# Altium PCB PCB-HC15C_REV1.PcbDoc (part 1 of 2)
Units mil, origin at the board's own origin, x right, y up, seen from the top; angles counter-clockwise.
Board outline 5600 x 4750 mil, 4 copper layers (Top Layer, InternalPlane1, InternalPlane2, Bottom Layer); 217 components, 162 nets, 705 pads, 241 vias.
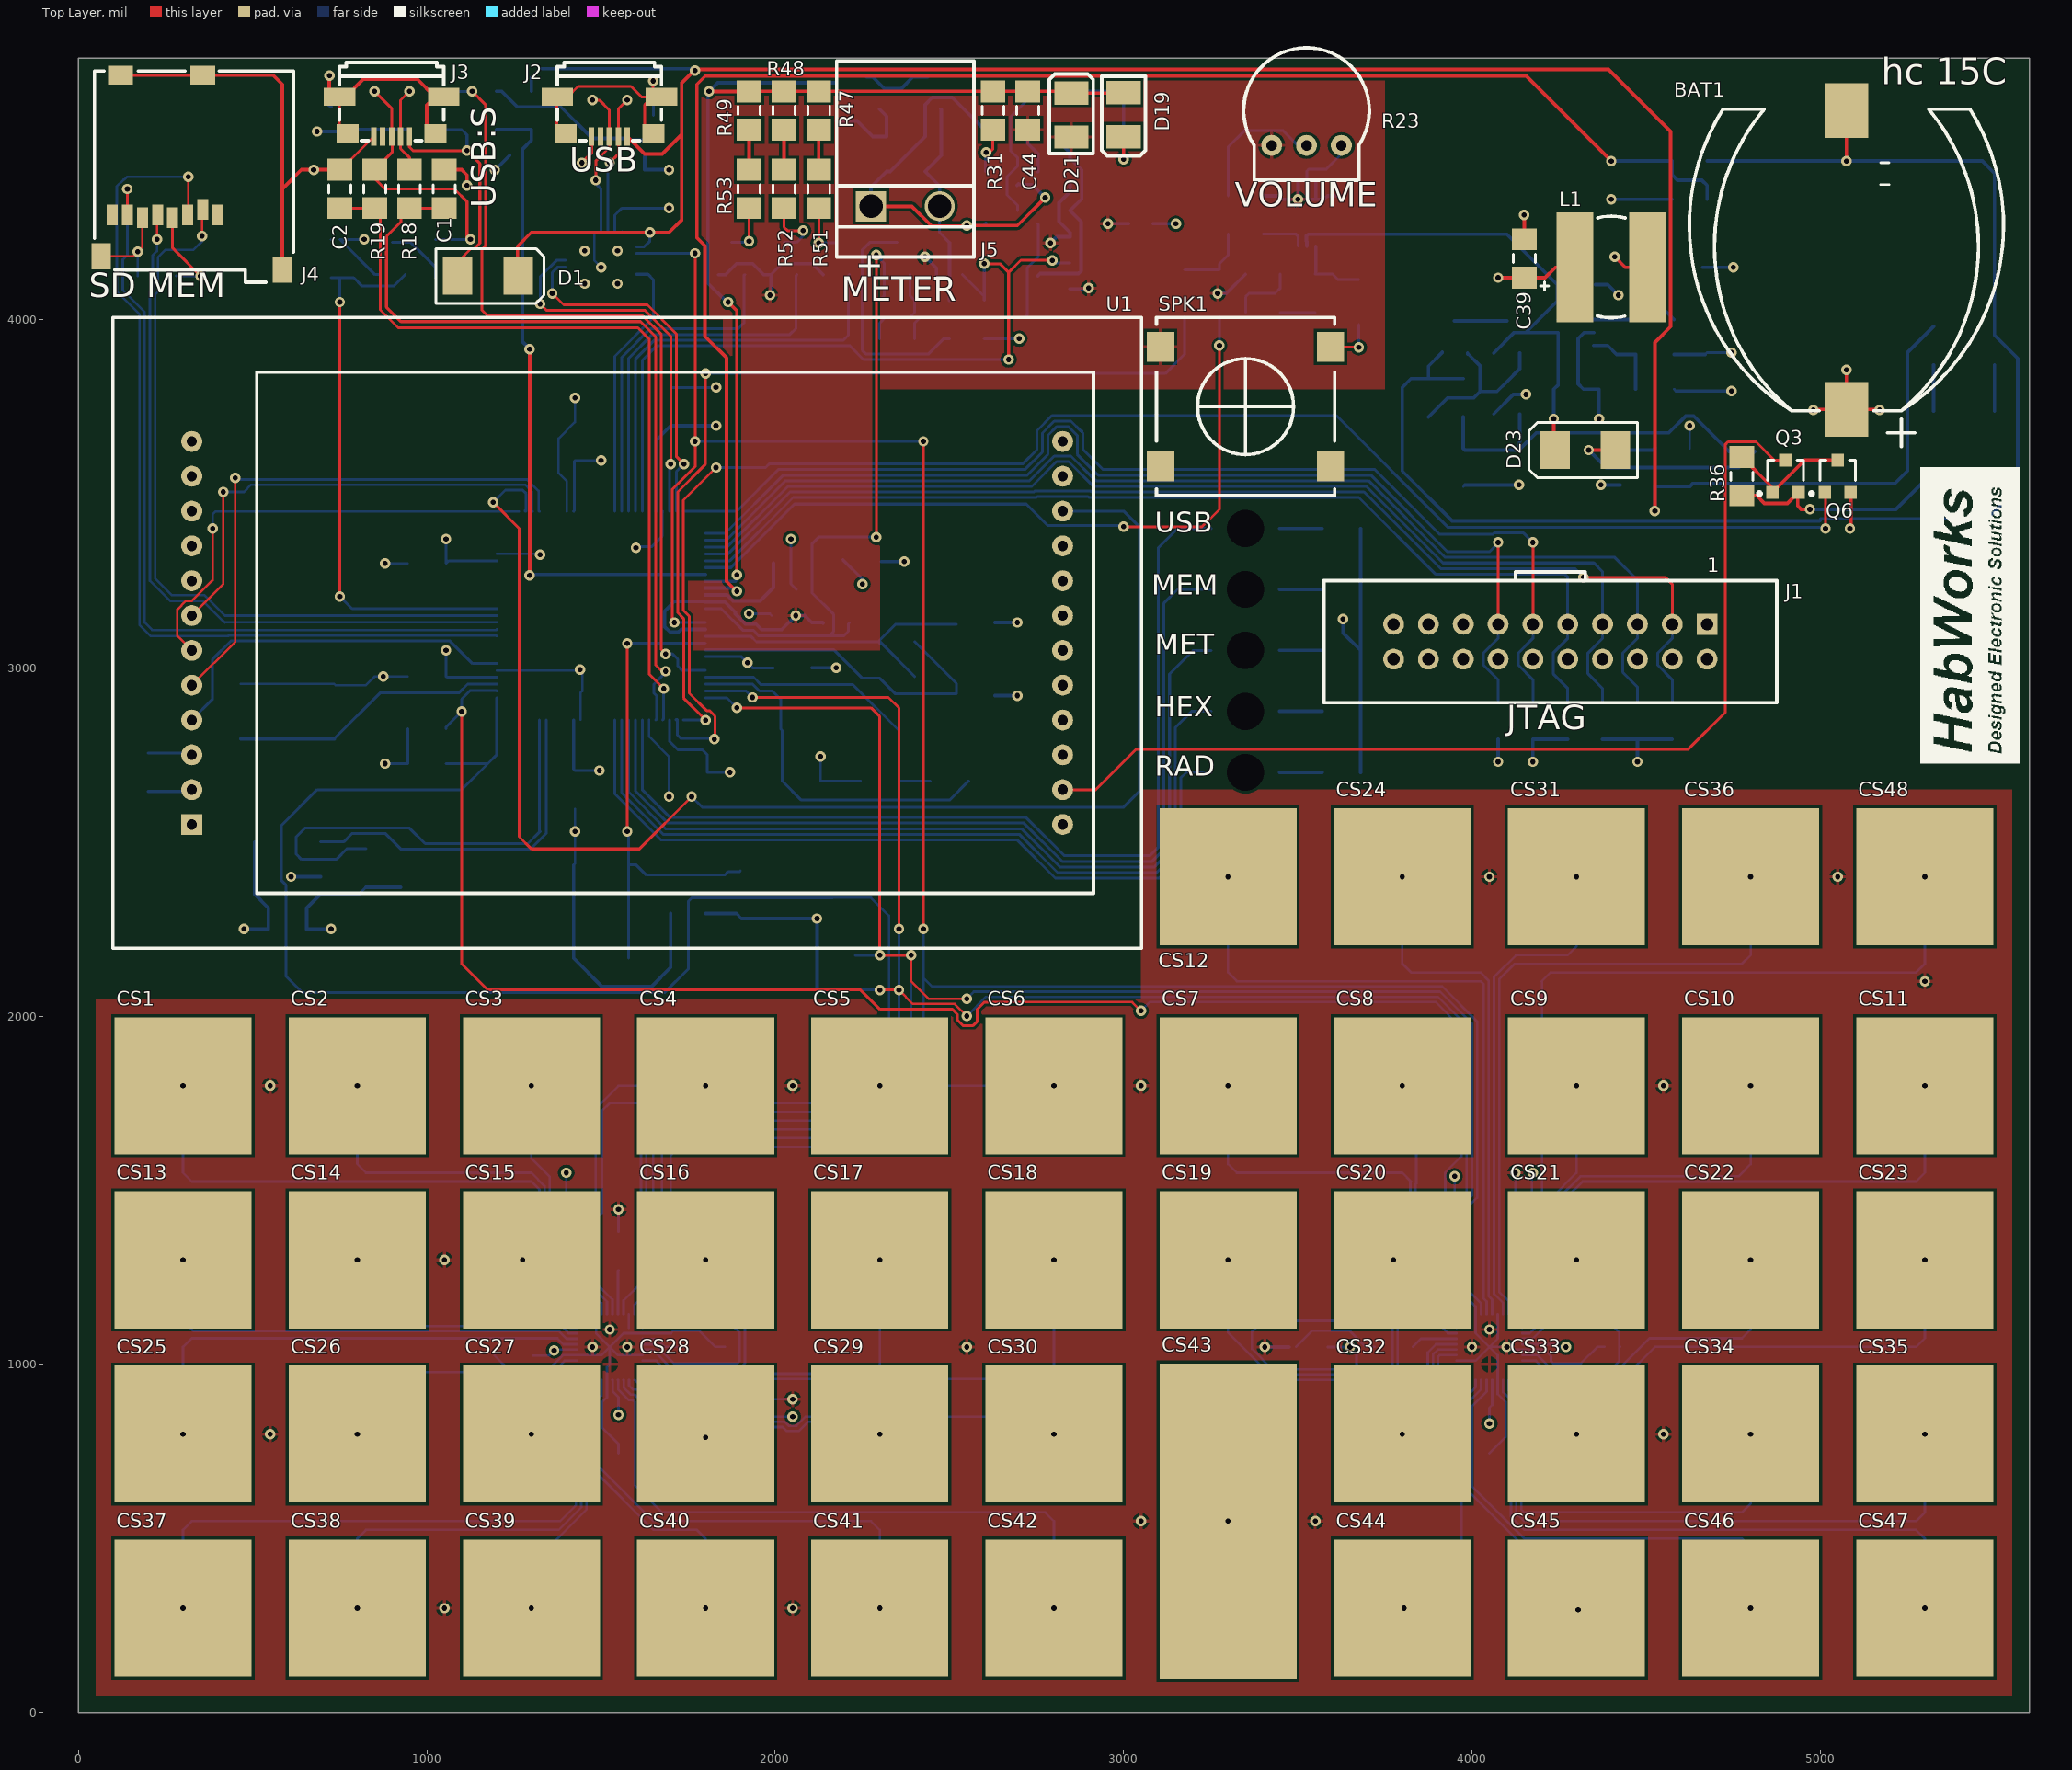
[diagram p0: Top Layer view]
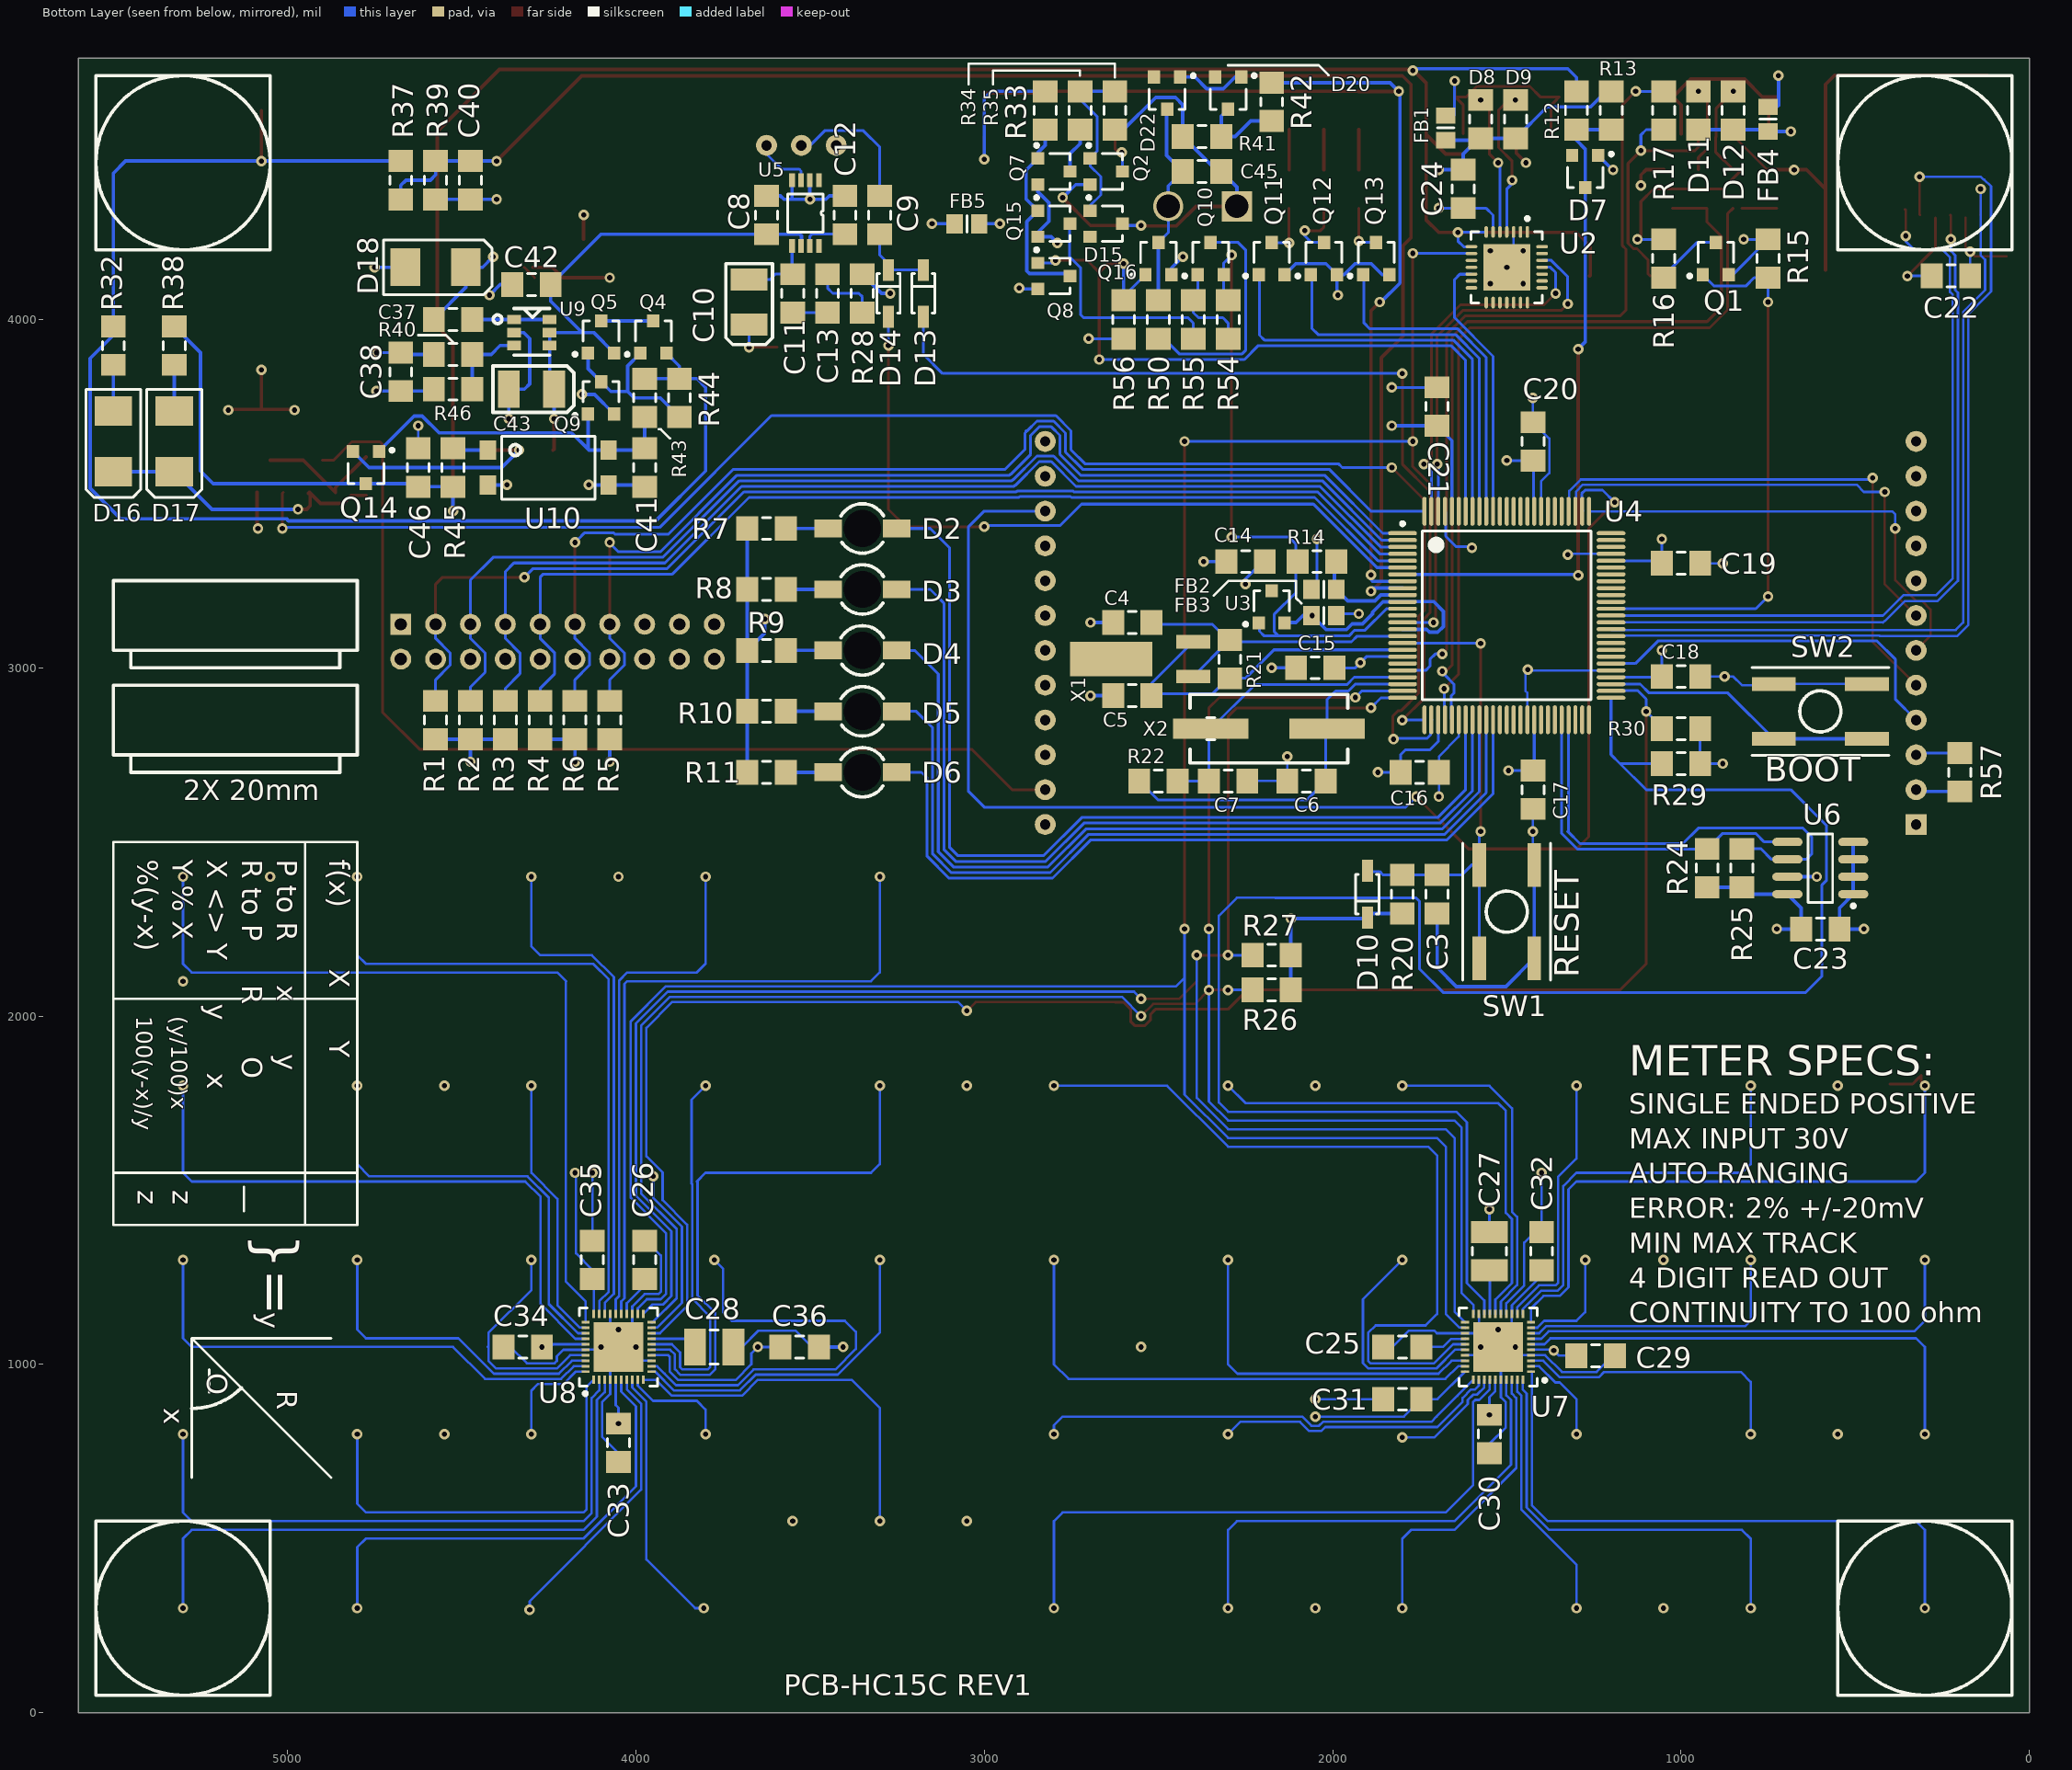
[diagram p1: Bottom Layer view, seen from below]
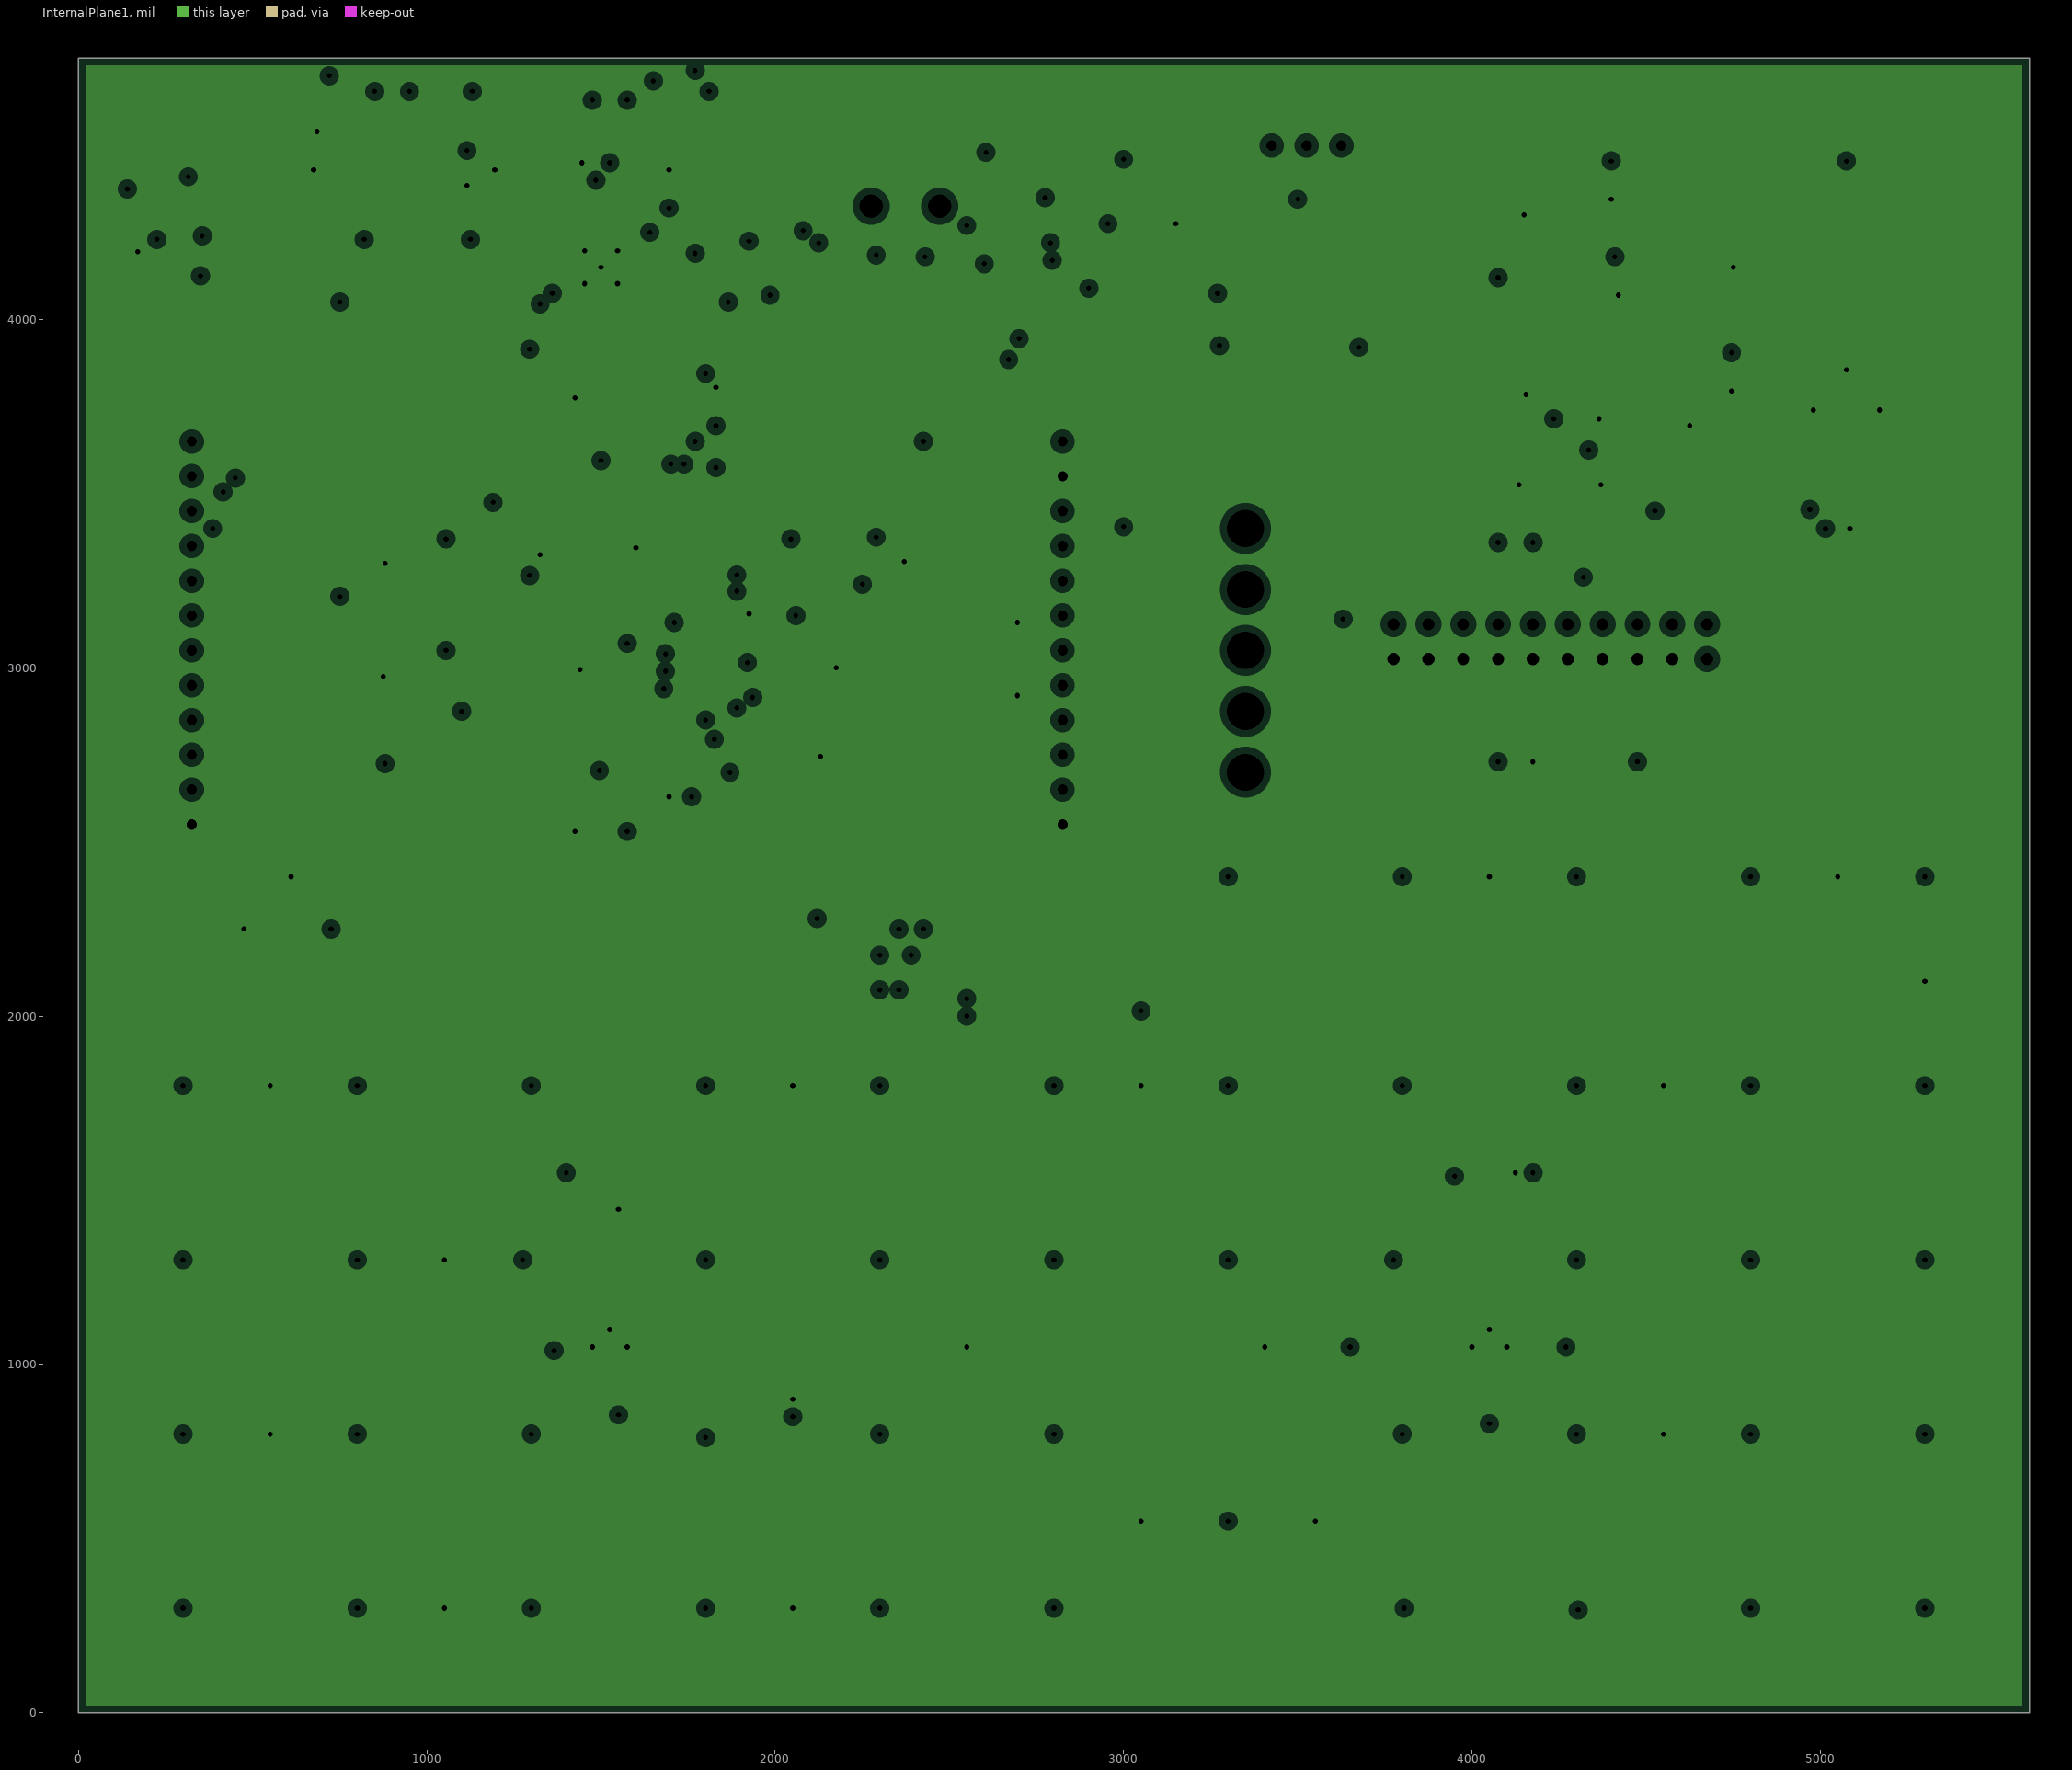
[diagram p2: InternalPlane1, clearances drawn from the general rule]
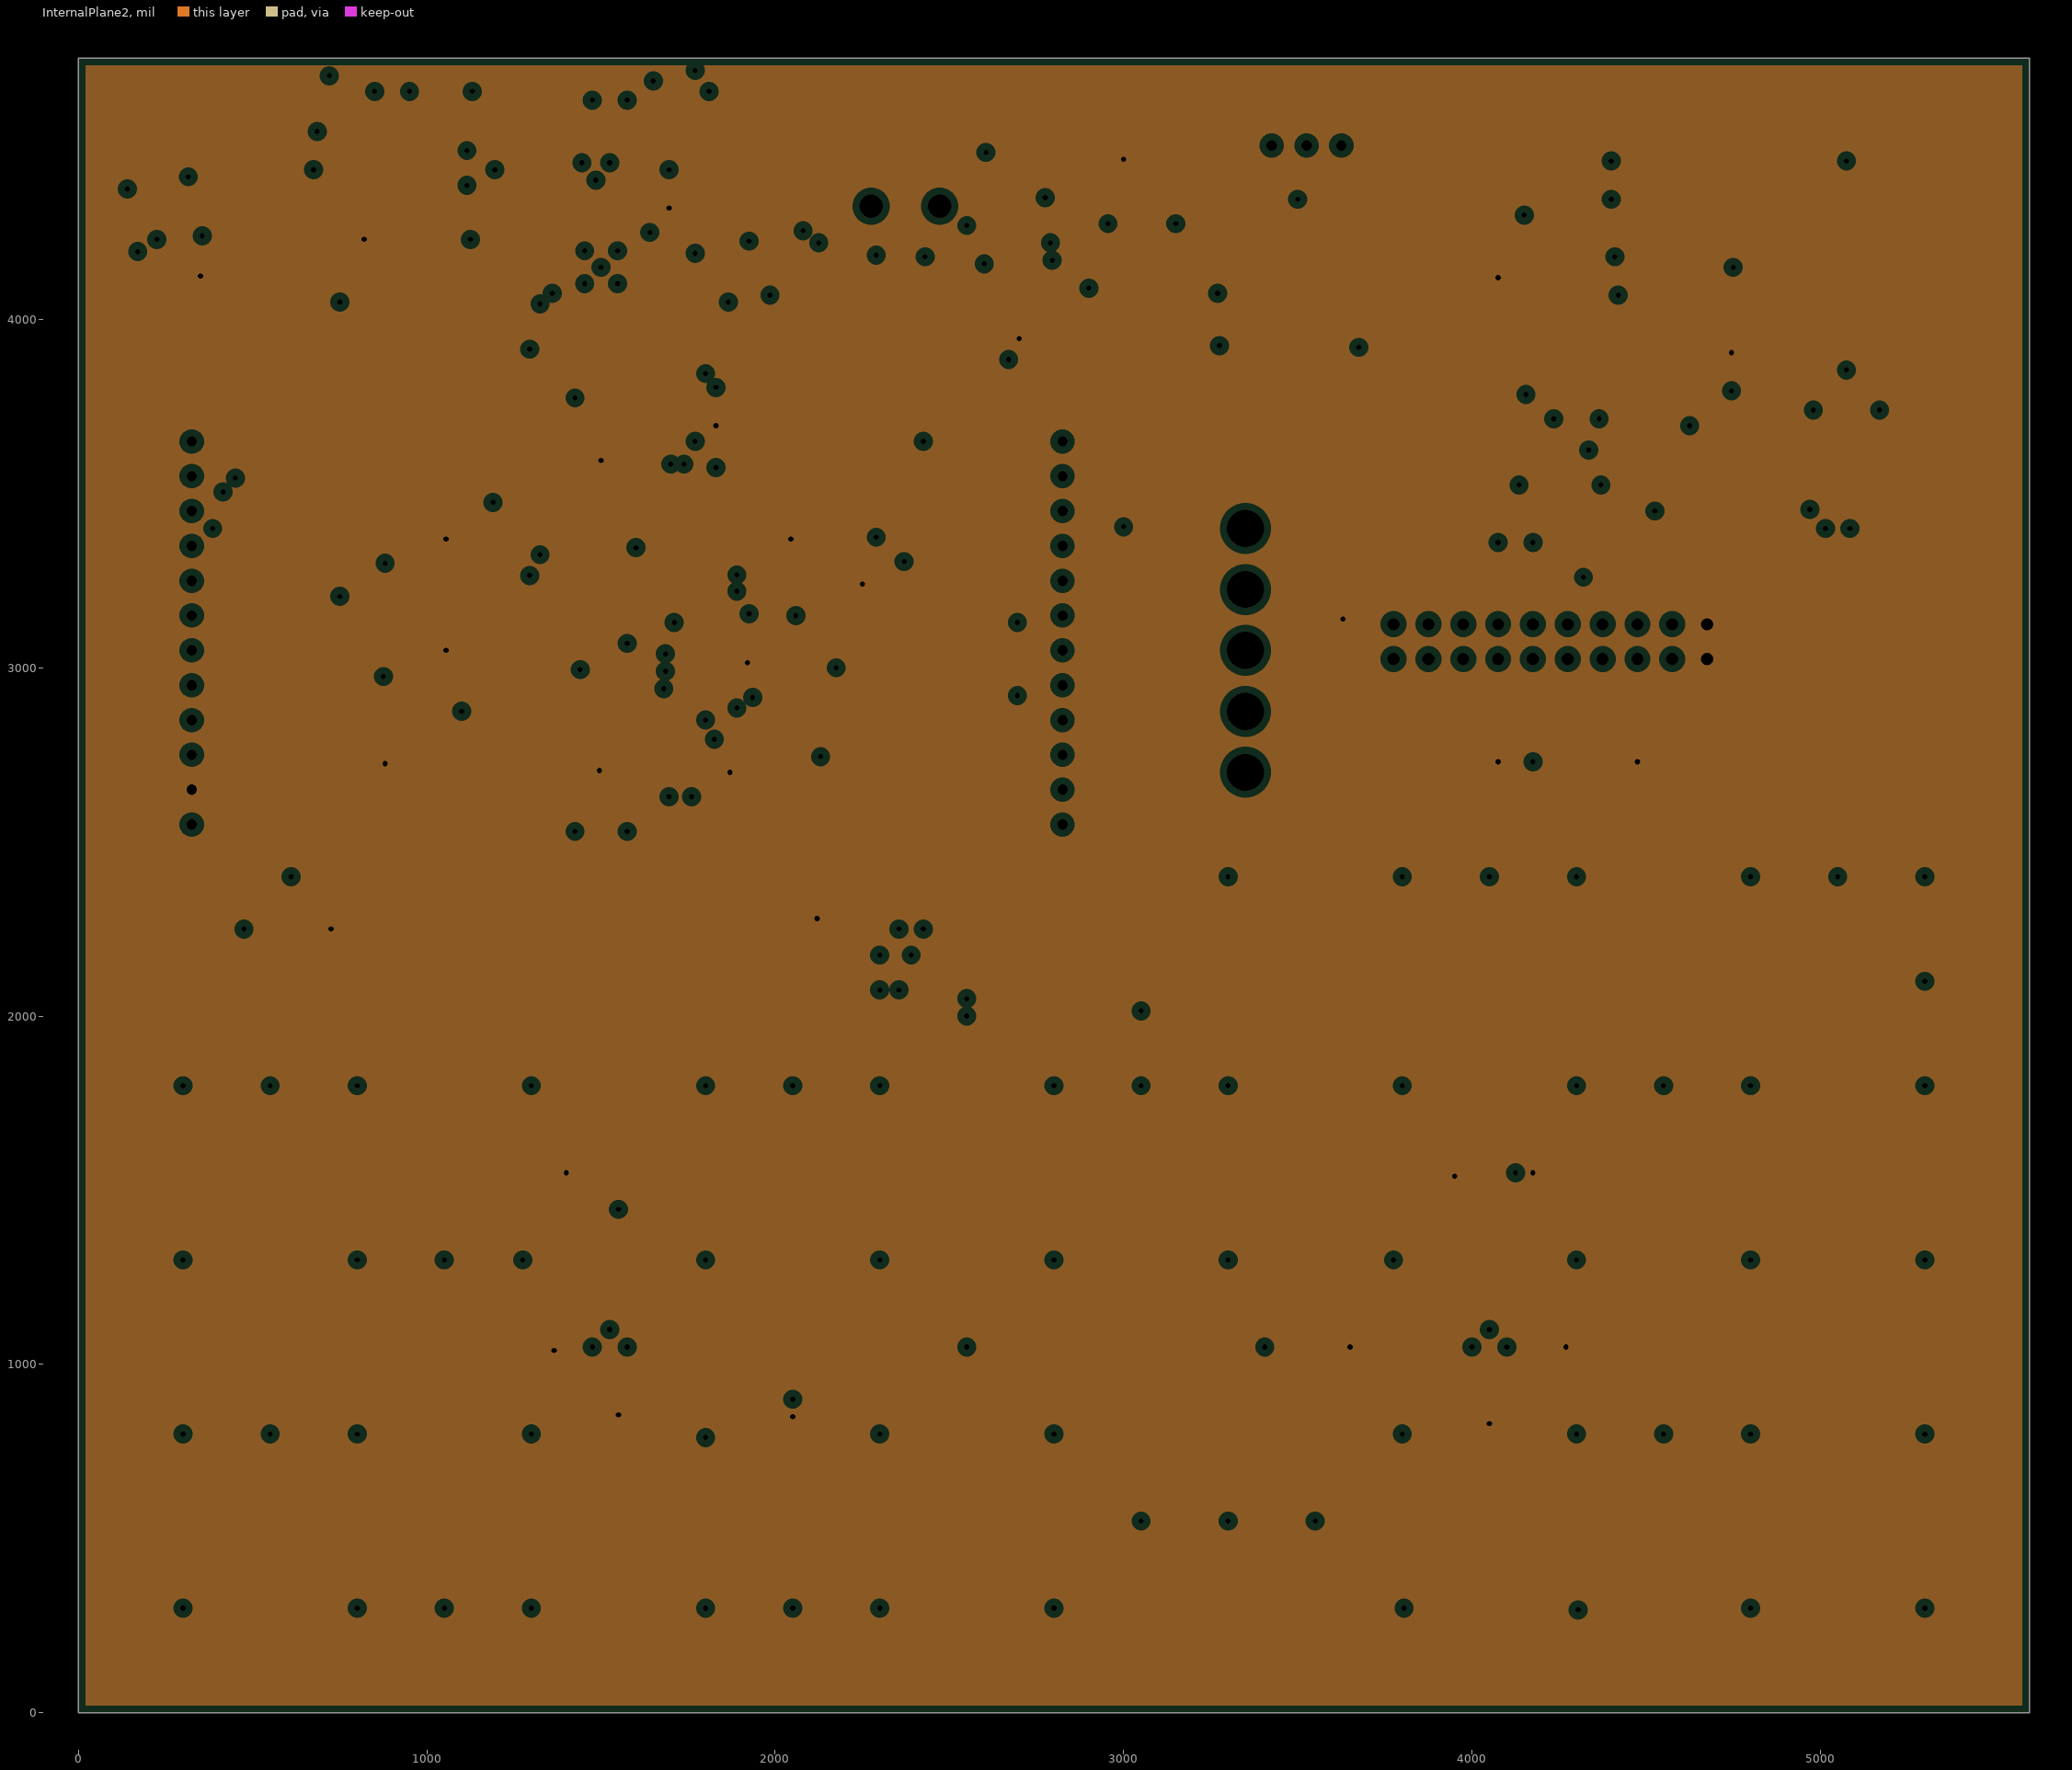
[diagram p3: InternalPlane2, clearances drawn from the general rule]

## Layer stack, top to bottom
Top Layer: signal copper 1.4
Dielectric: core 12.6, FR-4, Dk 4.8
InternalPlane1: plane copper 1.4, net GND
Dielectric: prepreg 12.6, FR-4, Dk 4.8
InternalPlane2: plane copper 1.4, net 3.3V
Dielectric: core 12.6, FR-4, Dk 4.8
Bottom Layer: signal copper 1.4

## Board outline
0,0 5600,0 5600,4750 0,4750

## Design rules (kind name [scope] priority, off if disabled: settings)
Clearance UNDERMOUNT_LED [(HasFootprint('OSRAM_XX_M47K')) vs (HasFootprint('OSRAM_XX_M47K'))] p1: gap=5
Clearance Clearance_U8 [(InComponent('U8')) vs (InComponent('U8'))] p2: gap=7
Clearance Clearance_U7 [(InComponent('U7')) vs (InComponent('U7'))] p3: gap=7
Clearance Clearance_U4 [(InComponent('U4')) vs (InComponent('U4'))] p4: gap=7.8
Clearance Clearance_U2 [(InComponent('U2')) vs (InComponent('U2'))] p5: gap=7
Clearance Clearance_USB_J3 [(InComponent('J3')) vs (InComponent('J3'))] p6: gap=7
Clearance Clearance_USB_J2 [(InComponent('J2')) vs (InComponent('J2'))] p7: gap=7
Clearance [All] p8: gap=8
DiffPairsRouting [All] p1: maxlimit=10 minlimit=10 mostfreqgap=10 maxuncoupledlength=500
HoleSize [All] p1: absolutevalues=TRUE maxlimit=125 minlimit=1 maxpercent=80.000 minpercent=20.000
MinimumSolderMaskSliver MinimumSolderMaskSliver_U5 [(InComponent('U5')) vs (InComponent('U5'))] p1: minsoldermaskwidth=0
MinimumSolderMaskSliver MinimumSolderMaskSliver_U9 [(InComponent('U9')) vs (InComponent('U9'))] p2: minsoldermaskwidth=0
MinimumSolderMaskSliver MinimumSolderMaskSliver_J4 [(InComponent('J4')) vs (InComponent('J4'))] p3: minsoldermaskwidth=0
MinimumSolderMaskSliver MinimumSolderMaskSliver_U8 [(InComponent('U8')) vs (InComponent('U8'))] p4: minsoldermaskwidth=0
MinimumSolderMaskSliver MinimumSolderMaskSliver_U7 [(InComponent('U7')) vs (InComponent('U7'))] p5: minsoldermaskwidth=0
MinimumSolderMaskSliver MinimumSolderMaskSliver_U2 [(InComponent('U2')) vs (InComponent('U2'))] p6: minsoldermaskwidth=0
MinimumSolderMaskSliver MinimumSolderMaskSliver_J3 [(InComponent('J3')) vs (InComponent('J3'))] p7: minsoldermaskwidth=0
MinimumSolderMaskSliver MinimumSolderMaskSliver_J2 [(InComponent('J2')) vs (InComponent('J2'))] p8: minsoldermaskwidth=0
MinimumSolderMaskSliver [All] p9: minsoldermaskwidth=8
PlaneClearance [All] p1: clearance=20
PlaneConnect [All] p1: planeconnectstyle=Relief reliefexpansion=20 reliefentries=4 reliefconductorwidth=10 reliefairgap=10
PolygonConnect [All] p1: connectstyle=Relief reliefconductorwidth=10 reliefentries=4 polygonreliefangle="90 Angle"
RoomDefinition MC [InComponentClass('Components Class 2')] p1: confinementstyle=ConfineIn formatcopy=TRUE lockcomponents=FALSE outline 2750,3475 1900,3475 1900,3925 1125,3925 1125,3475 375,3475 375,2700 1300,2700 1300,2050 1975,2050 2000,2075 2000,2325 2450,2325 2475,2350 2475,2850 2750,2850
RoomDefinition USB_UART_CIRCUIT [InComponentClass('Components Class 2')] p2: confinementstyle=ConfineIn formatcopy=TRUE lockcomponents=FALSE outline 1175,4775 1725,4775 1725,3975 1175,3975
RoomDefinition AUDIO_CIRCUIT [InComponentClass('Components Class 7')] p3: confinementstyle=ConfineIn formatcopy=TRUE lockcomponents=FALSE outline 3125,4825 3775,4825 3775,3875 3125,3875
RoomDefinition METER_CIRCUIT [InComponentClass('Components Class 3')] p4: confinementstyle=ConfineIn formatcopy=TRUE lockcomponents=FALSE outline 1775,4800 3100,4800 3100,3875 1775,3875
RoutingVias [All] p1: holewidth=15 width=30 viastyle="Through Hole" minholewidth=15 minwidth=30 maxholewidth=15 maxwidth=30
ShortCircuit [All] p1 off: allowed=FALSE
SilkToSilkClearance [All] p1 off: silktosilkclearance=10
SilkscreenOverComponentPads [All] p1 off: minsilkscreentomaskgap=10
SolderMaskExpansion [All] p1: expansion=4
Width [All] p1: maxlimit=20 minlimit=7 preferedwidth=8
20 further rules are at their usual default settings.

## Classes and differential pairs
component class SCH-HC15C_REV1_PG2: C1 C2 C3 C4 C5 C6 C7 C8 C9 C10 C11 C12 C13 C14 C15 C16 C17 C18 C19 C20 C21 C22 C23 C24 D1 D2 D3 D4 D5 D6 D7 D8 D9 D10 D11 D12 D13 D14 FB1 FB2 FB3 FB4 J1 J2 J3 J4 Q1 R1 R2 R3 R4 R5 R6 R7 R8 R9 R10 R11 R12 R13 R14 R15 R16 R17 R18 R19 R20 R21 R22 R23 R24 R25 R26 R27 R28 R57 SPK1 SW1 SW2 U1 U2 U3 U4 U5 U6 X1 X2
component class SCH-HC15C_REV1_PG3: BAT1 C25 C26 C27 C28 C29 C30 C31 C32 C33 C34 C35 C36 C37 C38 C39 C40 C41 C42 C43 C44 C45 C46 CS1 CS2 CS3 CS4 CS5 CS6 CS7 CS8 CS9 CS10 CS11 CS12 CS13 CS14 CS15 CS16 CS17 CS18 CS19 CS20 CS21 CS22 CS23 CS24 CS25 CS26 CS27 CS28 CS29 CS30 CS31 CS32 CS33 CS34 CS35 CS36 CS37 CS38 CS39 CS40 CS41 CS42 CS43 CS44 CS45 CS46 CS47 CS48 D15 D16 D17 D18 D19 D20 D21 D22 D23 FB5 J5 L1 Q2 Q3 Q4 Q5 Q6 Q7 Q8 Q9 Q10 Q11 Q12 Q13 Q14 Q15 Q16 R29 R30 R31 R32 R33 R34 R35 R36 R37 R38 R39 R40 R41 R42 R43 R44 R45 R46 R47 R48 R49 R50 R51 R52 R53 R54 R55 R56 U7 U8 U9 U10
differential pair USB: +USB_P -USB_N
differential pair USBD: +USBD_P -USBD_N

## Components (designator, comment, footprint, x,y, rotation, side; value= is the part's Value field where it differs from the comment)
BAT1 "CDEVA00082_1" KEYSTONE_1062 5075,4600 r0 top
C1 "CDECA00095" "3216[1206] - TAN COLOR" 1050,4375 r90 top
C2 "CDECA00095" "3216[1206] - TAN COLOR" 750,4375 r90 top
C3 "CDECA00070" "3216[1206] - TAN COLOR" 1700,2350 r270 bottom
C4 "CDECA00143" "3216[1206] - TAN COLOR" 2575,3130 r0 bottom
C5 "CDECA00143" "3216[1206] - TAN COLOR" 2575,2920 r0 bottom
C6 "CDECA00095" "3216[1206] - TAN COLOR" 2300,2675 r180 bottom
C7 "CDECA00095" "3216[1206] - TAN COLOR" 2075,2675 r0 bottom
C8 "CDECA00070" "3216[1206] - TAN COLOR" 3625,4300 r270 bottom
C9 "CDECA00070" "3216[1206] - TAN COLOR" 3300,4300 r90 bottom
C10 "CDECA00139_2" CAP_TANT_3528 3675,4050 r90 bottom
C11 "CDECA00070" "3216[1206] - TAN COLOR" 3550,4075 r270 bottom
C12 "CDECA00070" "3216[1206] - TAN COLOR" 3400,4300 r90 bottom
C13 "CDECA00070" "3216[1206] - TAN COLOR" 3450,4075 r90 bottom
C14 "CDECA00070" "3216[1206] - TAN COLOR" 2250,3305 r0 bottom
C15 "CDECA00070" "3216[1206] - TAN COLOR" 2050,3000 r0 bottom
C16 "CDECA00070" "3216[1206] - TAN COLOR" 1750,2700 r180 bottom
C17 "CDECA00070" "3216[1206] - TAN COLOR" 1425,2650 r270 bottom
C18 "CDECA00070" "3216[1206] - TAN COLOR" 1000,2975 r180 bottom
C19 "CDECA00070" "3216[1206] - TAN COLOR" 1000,3300 r180 bottom
C20 "CDECA00070" "3216[1206] - TAN COLOR" 1425,3650 r90 bottom
C21 "CDECA00070" "3216[1206] - TAN COLOR" 1700,3750 r90 bottom
C22 "CDECA00070" "3216[1206] - TAN COLOR" 225,4125 r180 bottom
C23 "CDECA00070" "3216[1206] - TAN COLOR" 600,2250 r180 bottom
C24 "CDECA00070" "3216[1206] - TAN COLOR" 1625,4375 r90 bottom
C25 "CDECA00143" "3216[1206] - TAN COLOR" 1800,1050 r0 bottom
C26 "CDECA00143" "3216[1206] - TAN COLOR" 3975,1300 r90 bottom
C27 "CDECA00122" 3225[1210] 1550,1325 r90 bottom
C28 "CDECA00122" 3225[1210] 3775,1050 r180 bottom
C29 "CDECA00070" "3216[1206] - TAN COLOR" 1245,1025 r180 bottom
C30 "CDECA00070" "3216[1206] - TAN COLOR" 1550,800 r270 bottom
C31 "CDECA00070" "3216[1206] - TAN COLOR" 1800,900 r0 bottom
C32 "CDECA00070" "3216[1206] - TAN COLOR" 1400,1325 r270 bottom
C33 "CDECA00070" "3216[1206] - TAN COLOR" 4050,775 r270 bottom
C34 "CDECA00070" "3216[1206] - TAN COLOR" 4325,1050 r0 bottom
C35 "CDECA00070" "3216[1206] - TAN COLOR" 4125,1300 r90 bottom
C36 "CDECA00070" "3216[1206] - TAN COLOR" 3530,1050 r180 bottom
C37 "CDECA00143_1" "3216[1206] - TAN COLOR" 4525,4000 r0 bottom
C38 "CDECA00070" "3216[1206] - TAN COLOR" 4675,3850 r270 bottom
C39 "CDECA00139_1" "3216[1206] - TANTALUM" 4150,4175 r90 top
C40 "CDECA00085" "3216[1206] - TAN COLOR" 4475,4400 r270 bottom
C41 "CDECA00085" "3216[1206] - TAN COLOR" 3975,3575 r90 bottom
C42 "CDECA00070" "3216[1206] - TAN COLOR" 4300,4100 r0 bottom
C43 "CDECA00110_1" CAP_TANT_3528 4300,3800 r0 bottom
C44 "CDECA00070" "3216[1206] - TAN COLOR" 2725,4600 r270 top
C45 "CDECA00085" "3216[1206] - TAN COLOR" 2375,4425 r0 bottom
C46 "CDECA00085" "3216[1206] - TAN COLOR" 4625,3575 r90 bottom
CS1 "CAP_SENSOR" CAPTOUCH1_10X10 300,1800 r0 top
CS2 "CAP_SENSOR" CAPTOUCH1_10X10 800,1800 r0 top
CS3 "CAP_SENSOR" CAPTOUCH1_10X10 1300,1800 r0 top
CS4 "CAP_SENSOR" CAPTOUCH1_10X10 1800,1800 r0 top
CS5 "CAP_SENSOR" CAPTOUCH1_10X10 2300,1800 r0 top
CS6 "CAP_SENSOR" CAPTOUCH1_10X10 2800,1800 r0 top
CS7 "CAP_SENSOR" CAPTOUCH1_10X10 3300,1800 r0 top
CS8 "CAP_SENSOR" CAPTOUCH1_10X10 3800,1800 r0 top
CS9 "CAP_SENSOR" CAPTOUCH1_10X10 4300,1800 r0 top
CS10 "CAP_SENSOR" CAPTOUCH1_10X10 4800,1800 r0 top
CS11 "CAP_SENSOR" CAPTOUCH1_10X10 5300,1800 r0 top
CS12 "CAP_SENSOR" CAPTOUCH1_10X10 3300,2400 r0 top
CS13 "CAP_SENSOR" CAPTOUCH1_10X10 300,1300 r0 top
CS14 "CAP_SENSOR" CAPTOUCH1_10X10 800,1300 r0 top
CS15 "CAP_SENSOR" CAPTOUCH1_10X10 1300,1300 r0 top
CS16 "CAP_SENSOR" CAPTOUCH1_10X10 1800,1300 r0 top
CS17 "CAP_SENSOR" CAPTOUCH1_10X10 2300,1300 r0 top
CS18 "CAP_SENSOR" CAPTOUCH1_10X10 2800,1300 r0 top
CS19 "CAP_SENSOR" CAPTOUCH1_10X10 3300,1300 r0 top
CS20 "CAP_SENSOR" CAPTOUCH1_10X10 3800,1300 r0 top
CS21 "CAP_SENSOR" CAPTOUCH1_10X10 4300,1300 r0 top
CS22 "CAP_SENSOR" CAPTOUCH1_10X10 4800,1300 r0 top
CS23 "CAP_SENSOR" CAPTOUCH1_10X10 5300,1300 r0 top
CS24 "CAP_SENSOR" CAPTOUCH1_10X10 3800,2400 r0 top
CS25 "CAP_SENSOR" CAPTOUCH1_10X10 300,800 r0 top
CS26 "CAP_SENSOR" CAPTOUCH1_10X10 800,800 r0 top
CS27 "CAP_SENSOR" CAPTOUCH1_10X10 1300,800 r0 top
CS28 "CAP_SENSOR" CAPTOUCH1_10X10 1800,800 r0 top
CS29 "CAP_SENSOR" CAPTOUCH1_10X10 2300,800 r0 top
CS30 "CAP_SENSOR" CAPTOUCH1_10X10 2800,800 r0 top
CS31 "CAP_SENSOR" CAPTOUCH1_10X10 4300,2400 r0 top
CS32 "CAP_SENSOR" CAPTOUCH1_10X10 3800,800 r0 top
CS33 "CAP_SENSOR" CAPTOUCH1_10X10 4300,800 r0 top
CS34 "CAP_SENSOR" CAPTOUCH1_10X10 4800,800 r0 top
CS35 "CAP_SENSOR" CAPTOUCH1_10X10 5300,800 r0 top
CS36 "CAP_SENSOR" CAPTOUCH1_10X10 4800,2400 r0 top
CS37 "CAP_SENSOR" CAPTOUCH1_10X10 300,300 r0 top
CS38 "CAP_SENSOR" CAPTOUCH1_10X10 800,300 r0 top
CS39 "CAP_SENSOR" CAPTOUCH1_10X10 1300,300 r0 top
CS40 "CAP_SENSOR" CAPTOUCH1_10X10 1800,300 r0 top
CS41 "CAP_SENSOR" CAPTOUCH1_10X10 2300,300 r0 top
CS42 "CAP_SENSOR" CAPTOUCH1_10X10 2800,300 r0 top
CS43 "CAP_SENSOR_ENT" CAPTOUCH1_10X23 3300,550 r0 top
CS44 "CAP_SENSOR" CAPTOUCH1_10X10 3800,300 r0 top
CS45 "CAP_SENSOR" CAPTOUCH1_10X10 4300,300 r0 top
CS46 "CAP_SENSOR" CAPTOUCH1_10X10 4800,300 r0 top
CS47 "CAP_SENSOR" CAPTOUCH1_10X10 5300,300 r0 top
CS48 "CAP_SENSOR" CAPTOUCH1_10X10 5300,2400 r0 top
D1 "CDEDA00019" DIODE_SMB 1175,4125 r0 top
D2 "CDELA00019_1" OSRAM_XX_M47K 3350,3400 r0 bottom
D3 "CDELA00019_1" OSRAM_XX_M47K 3350,3225 r0 bottom
D4 "CDELA00019_1" OSRAM_XX_M47K 3350,3050 r0 bottom
D5 "CDELA00019_1" OSRAM_XX_M47K 3350,2875 r0 bottom
D6 "CDELA00019_1" OSRAM_XX_M47K 3350,2700 r0 bottom
D7 "CDEDA00043" "SOT23 - TRANSISTOR" 1275,4425 r0 bottom
D8 "CDEDA00037_1" 3216[1206] 1575,4575 r90 bottom
D9 "CDEDA00037_1" 3216[1206] 1475,4575 r90 bottom
D10 "CDEDA00020" SOD123 1900,2350 r270 bottom
D11 "CDEDA00037_1" 3216[1206] 950,4600 r90 bottom
D12 "CDEDA00037_1" 3216[1206] 850,4600 r90 bottom
D13 "CDEDA00020" SOD123 3175,4075 r90 bottom
D14 "CDEDA00020" SOD123 3275,4075 r90 bottom
D15 "CDEDA00055_1" "SOT23 - TRANSISTOR" 2650,4275 r270 bottom
D16 "CDEDA00019" DIODE_SMB 5500,3650 r270 bottom
D17 "CDEDA00019" DIODE_SMB 5325,3650 r270 bottom
D18 "CDEDA00019" DIODE_SMB 4575,4150 r180 bottom
D19 "CDEDA00055_3" "DIODE SMA" 3000,4525 r90 top
D20 "CDEDA00055_2" "SOT23 - TRANSISTOR" 2300,4650 r0 bottom
D21 "CDEDA00055_3" "DIODE SMA" 2850,4650 r270 top
D22 "CDEDA00055_2" "SOT23 - TRANSISTOR" 2475,4650 r0 bottom
D23 "CDEDA00019" DIODE_SMB 4325,3625 r180 top
FB1 "CDEVA00115" 2012[0805] 1675,4550 r90 bottom
FB2 "CDEVA00115" 2012[0805] 2025,3225 r180 bottom
FB3 "CDEVA00115" 2012[0805] 2025,3150 r0 bottom
FB4 "CDEVA00115" 2012[0805] 750,4575 r90 bottom
FB5 "CDEVA00115" 2012[0805] 3050,4275 r180 bottom
J1 "CDTDA00013" HDR_2X10_100MIL 4675,3125 r270 top
J2 "CDTDA_1" TYCO_1981584-1 1575,4525 r180 top
J3 "CDTDA_1" TYCO_1981584-1 950,4525 r180 top
J4 "CDTDA_2" 3M_2908-05WB-MG 400,4300 r180 top
J5 "CDTTB001" PHOENIX_CONTACT_1933189 2275,4325 r0 top
L1 "CDEHA00005_1" BOURNS_SDR0805-XXXX 4400,4150 r180 top
Q1 "CDENA00031" "SOT23 - TRANSISTOR" 900,4175 r180 bottom
Q2 "CDENA00031_1" "SOT23 - TRANSISTOR" 2650,4425 r270 bottom
Q3 "CDENA00031" "SOT23 - TRANSISTOR" 4900,3550 r0 top
Q4 "CDENA00031_3" "SOT23 - TRANSISTOR" 3950,3950 r180 bottom
Q5 "CDENA00031_3" "SOT23 - TRANSISTOR" 4100,3950 r180 bottom
Q6 "CDENA00030" "SOT23 - TRANSISTOR" 5050,3550 r0 top
Q7 "CDENA00030" "SOT23 - TRANSISTOR" 2800,4425 r270 bottom
Q8 "CDENA00030" "SOT23 - TRANSISTOR" 2800,4125 r270 bottom
Q9 "CDENA00030" "SOT23 - TRANSISTOR" 4100,3775 r180 bottom
Q10 "CDENA00031" "SOT23 - TRANSISTOR" 2350,4175 r180 bottom
Q11 "CDENA00031_2" "SOT23 - TRANSISTOR" 2175,4175 r180 bottom
Q12 "CDENA00031_2" "SOT23 - TRANSISTOR" 2025,4175 r180 bottom
Q13 "CDENA00031_2" "SOT23 - TRANSISTOR" 1875,4175 r180 bottom
Q14 "CDENA00031_3" "SOT23 - TRANSISTOR" 4775,3575 r0 bottom
Q15 "CDENA00030" "SOT23 - TRANSISTOR" 2800,4275 r270 bottom
Q16 "CDENA00031_2" "SOT23 - TRANSISTOR" 2500,4175 r180 bottom
R1 "CDERA00170" 3216[1206] 4575,2850 r270 bottom
R2 "CDERA00170" 3216[1206] 4475,2850 r270 bottom
R3 "CDERA00170" 3216[1206] 4375,2850 r270 bottom
R4 "CDERA00170" 3216[1206] 4275,2850 r90 bottom
R5 "CDERA00170" 3216[1206] 4075,2850 r270 bottom
R6 "CDERA00170" 3216[1206] 4175,2850 r90 bottom
R7 "CDERA00192" 3216[1206] 3625,3400 r0 bottom
R8 "CDERA00192" 3216[1206] 3625,3225 r0 bottom
R9 "CDERA00192" 3216[1206] 3625,3050 r0 bottom
R10 "CDERA00192" 3216[1206] 3625,2875 r0 bottom
R11 "CDERA00192" 3216[1206] 3625,2700 r0 bottom
R12 "CDERA00170" 3216[1206] 1300,4600 r90 bottom
R13 "CDERA00170" 3216[1206] 1200,4600 r270 bottom
R14 "CDERA00275_9" 3216[1206] 2045,3305 r0 bottom
R15 "CDERA00198" 3216[1206] 750,4175 r90 bottom
R16 "CDERA00179" 3216[1206] 1050,4175 r270 bottom
R17 "CDERA00169" 3216[1206] 1050,4600 r270 bottom
R18 "CDERA00207" 3216[1206] 950,4375 r90 top
R19 "CDERA00207" 3216[1206] 850,4375 r90 top
R20 "CDERA00198" 3216[1206] 1800,2350 r270 bottom
R21 "CDERA00191" 3216[1206] 2295,3025 r270 bottom
R22 "CDERA00191" 3216[1206] 2500,2675 r0 bottom
R23 "CDERA00207_2" BOURNS_3352 3525,4500 r0 top
R24 "CDERA00170" 3216[1206] 925,2425 r270 bottom
R25 "CDERA00170" 3216[1206] 825,2425 r270 bottom
R26 "CDERA00170" 3216[1206] 2175,2075 r180 bottom
R27 "CDERA00170" 3216[1206] 2175,2175 r180 bottom
R28 "CDERA00142" 3216[1206] 3350,4075 r270 bottom
R29 "CDERA00170" 3216[1206] 1000,2725 r180 bottom
R30 "CDERA00170" 3216[1206] 1000,2825 r180 bottom
R31 "CDERA00176" 3216[1206] 2625,4600 r90 top
R32 "CDERA00154" 3216[1206] 5500,3925 r90 bottom
R33 "CDERA00198" 3216[1206] 2825,4600 r90 bottom
R34 "CDERA00275_8" 3216[1206] 2625,4600 r90 bottom
R35 "CDERA00170" 3216[1206] 2725,4600 r270 bottom
R36 "CDERA00275_8" 3216[1206] 4775,3550 r270 top
R37 "CDERA00198" 3216[1206] 4675,4400 r90 bottom
R38 "CDERA00273_2" 3216[1206] 5325,3925 r270 bottom
R39 "CDERA00198" 3216[1206] 4575,4400 r90 bottom
R40 "CDERA00273_1" 3216[1206] 4525,3900 r0 bottom
R41 "CDERA00275_2" 3216[1206] 2375,4525 r180 bottom
R42 "CDERA00275_7" 3216[1206] 2175,4625 r90 bottom
R43 "CDERA00198" 3216[1206] 3975,3775 r90 bottom
R44 "CDERA00275_8" 3216[1206] 3875,3775 r90 bottom
R45 "CDERA00192" 3216[1206] 4525,3575 r90 bottom
R46 "CDERA00195" 3216[1206] 4525,3800 r180 bottom
R47 "CDERA00275_4" 3216[1206] 2125,4600 r90 top
R48 "CDERA00275_5" 3216[1206] 2025,4600 r90 top
R49 "CDERA00275_3" 3216[1206] 1925,4600 r90 top
R50 "CDERA00181" 3216[1206] 2500,4000 r270 bottom
R51 "CDERA00181" 3216[1206] 2125,4375 r90 top
R52 "CDERA00275_6" 3216[1206] 2025,4375 r90 top
R53 "CDERA00209" 3216[1206] 1925,4375 r90 top
R54 "CDERA00198" 3216[1206] 2300,4000 r90 bottom
R55 "CDERA00195" 3216[1206] 2400,4000 r90 bottom
R56 "CDERA00198" 3216[1206] 2600,4000 r270 bottom
R57 "CDERA00154" 3216[1206] 200,2700 r90 bottom
SPK1 "CDEVA_2" PUI_AUDIO_SMS-1308MS-R 3350,3750 r180 top
SW1 "CDESA00095" PANASONIC_EVQQX 1500,2300 r270 bottom
SW2 "CDESA00095" PANASONIC_EVQQX 600,2875 r180 bottom
U1 "CDELA00023_1" EA_790-EADIP204J6NLW 13.62,200 r0 top locked
U2 "CDEUA00070_1" QFN50P500X500-28VBM-MODIFIED 1500,4150 r270 bottom
U3 "CDEUA00049" "SOT23 - TRANSISTOR" 2175,3175 r180 bottom
U4 "CDEUA00069_2" SQFP50P1600X1600-100M_MODIFIED 1500,3150 r180 bottom
U5 "CDEUA00071_1" MUA08A 3475,4400 r270 bottom
U6 "CDEUA00020" "S8_N: Linear Tech SO8 NARROW" 600,2425 r0 bottom
U7 "CDEUA00052_1" QFN40P500X500X80-41V_MODIFIED 1525,1050 r0 bottom
U8 "CDEUA00052_1" QFN40P500X500X80-41V_MODIFIED 4050,1050 r90 bottom
U9 "CDEUA00014_1" TSOT6 4350,4000 r270 bottom
U10 "CDEUA00013_1" SHARP_PC817 4425,3625 r180 bottom
X1 "CDEKA00015" CITIZEN_CMR200T 2400,2975 r90 bottom
X2 "CDEKA00019" HC49/US-SM 2350,2825 r180 bottom

## Footprints (in the part's own frame and the unit in brackets; to place one, negate y for a bottom-side part, rotate by r counter-clockwise, add the part's x,y. Pads: shape width x height; smd on the part's side, far side on the other; paste and mask are expansions set on the pad)
3M_2908-05WB-MG [mm] "MICROSD 8P PUSH PUSH"
  rect 0.8x1.5 smd: 1(0,0) 2(1.1,-0.4) 3(2.2,0) 4(3.3,0.2) 5(4.4,0) 6(5.5,0.2) 7(6.6,0) 8(7.7,0)
  rect 1.4x1.9 smd: 9(8.5,3) 12(-4.7,4)
  rect 1.8x1.4 smd: 10(7.1,-10.2) 11(1.1,-10.2)
  silkscreen extent -5.5,-10.5 9,4.9, body extent -5.5,-10.5 9,5, height 1.85
2012[0805] [mm] "Chip Resistor, Body 2.0x1.3mm, IPC Medium Density"
  rect 1.2x1.4 smd: 1(-0.9,0) 2(0.9,0)
  silkscreen extent 0,-0.6 0,0.6, body extent -1.2,-0.7 1.2,0.7, height 0.65
3216[1206] [mm] "Chip Resistor; Body 3.2 x 1.6 mm (LxW typ)"
  rect 1.6x1.8 smd: 1(-1.4,0) 2(1.4,0)
  silkscreen extent -0.3,-0.8 0.3,0.8, body extent -2.03,-0.76 2.03,0.76, height 0.56
"3216[1206] - TAN COLOR" [mm] "Chip Resistor; Body 3.2 x 1.6 mm (LxW typ)"
  rect 1.6x1.8 smd: 1(-1.4,0) 2(1.4,0)
  silkscreen extent -0.3,-0.8 0.3,0.8, body extent -2.03,-0.76 2.03,0.76, height 0.56
"3216[1206] - TANTALUM" [mm] "Chip Resistor; Body 3.2 x 1.6 mm (LxW typ)"
  rect 1.6x1.8 smd: 1(-1.4,0) 2(1.4,0)
  silkscreen extent -2.3,-1.8 0.3,0.8, body extent -2.03,-0.76 2.03,0.76, height 0.56
3225[1210] [mm] "Chip Resistor; Body 3.2 x 2.5 mm (LxW typ)"
  rect 1.6x2.7 smd: 1(-1.4,0) 2(1.4,0)
  silkscreen extent -0.3,-1.25 0.3,1.25, body extent -2.03,-1.14 2.03,1.14, height 0.56
BOURNS_3352 [mil] "RESISTOR POT THUMBWHEEL CERM TH"
  round 60 hole 30: 1(-100,0) 2(0,0) 3(100,0)
  silkscreen extent -180,-100 180,280, body extent -174,-100 175,275, height 105
BOURNS_SDR0805-XXXX [mm] "BOURNS SDR0805-680KL INDUCTOR"
  rect 2.7x8 smd: 1(-2.65,0) 2(2.65,0)
  silkscreen extent -1,-3.73 1.01,3.69, body extent -3.87,-3.89 3.9,3.89, height 5
CAP_TANT_3528 [mm] "Chip Capacitor, Body 3.81x2.54mm, IPC Medium Density"
  rect 1.6x2.7 smd: 1(-1.65,0) 2(1.65,0)
  silkscreen extent -3.1,-1.7 2.8,1.7, body extent -2.2,-1.4 2.2,1.4, height 1.66
CAPTOUCH1_10X10 [mm] "Cap Touch pad 10x10mm"
  rect 10x10 smd: 1(0,0)
CAPTOUCH1_10X23 [mm] "Cap Touch pad 10x10mm"
  rect 10x23 smd: 1(0,0)
CITIZEN_CMR200T [mm] "CRYSTAL, CYLINDRICAL"
  rect 1x2.5 smd: 1(0,0) 2(2.54,0)
  rect 2.5x6 smd: 3(1.27,6)
  body extent 0.2,3.3 2.3,8.8, height 2
"DIODE SMA" [mm] "SMA DIODE FOOTPRINT"
  rect 1.7x2.5 smd: 1(3.2,0) 2(0,0)
  silkscreen extent -1.4,-1.6 4.4,1.6, body extent -0.5,-1.5 3.8,1.5, height 2.11
DIODE_SMB [mil] "DIODE SMB PACKAGE"
  rect 85x107.99 smd: 1(-87.01,0) 2(87.01,0)
  silkscreen extent -150,-79 161,79, body extent -118,-79 118,79, height 91
EA_790-EADIP204J6NLW [mil] "DISPLAY, 4X20, WITH ICONS, BLK&WHT, LED BACKLIGHT, ROHS"
  rect 60x60 hole 30: 1(311.38,2350)
  round 60 hole 30: 2(311.38,2450) 3(311.38,2550) 4(311.38,2650) 5(311.38,2750) 6(311.38,2850) 7(311.38,2950) 8(311.38,3050) 9(311.38,3150) 10(311.38,3250) 11(311.38,3350) 12(311.38,3450) 13(2811.38,3450) 14(2811.38,3350) 15(2811.38,3250) 16(2811.38,3150) 17(2811.38,3050) 18(2811.38,2950) 19(2811.38,2850) 20(2811.38,2750) 21(2811.38,2650) 22(2811.38,2550) 23(2811.38,2450) 24(2811.38,2350)
  silkscreen extent 85,1995 3038,3806, body extent 85,1995 3038,3806, height 429
HC49/US-SM [mm] "Chip Resistor; Body 3.2 x 1.6 mm (LxW typ)"
  rect 5.5x1.5 smd: 1(0,0) 2(8.5,0)
  silkscreen extent -1.5,-2.5 10,2.5, body extent -1,-2 9.5,2, height 4.19
HDR_2X10_100MIL [mil] "HEADER, 2X10, 100MIL SPACING, TH"
  rect 60x60 hole 35: 1(0,0)
  round 60 hole 35: 2(100,0) 3(0,-100) 4(100,-100) 5(0,-200) 6(100,-200) 7(0,-300) 8(100,-300) 9(0,-400) 10(100,-400) 11(0,-500) 12(100,-500) 13(0,-600) 14(100,-600) 15(0,-700) 16(100,-700) 17(0,-800) 18(100,-800) 19(0,-900) 20(100,-900)
  silkscreen extent -150,-1100 225,200, body extent -123,-1100 228,200, height 350
KEYSTONE_1062 [mm] "CONN, 20MM DOUBLE STACK BATTERY HOLDER"
  rect 3.2x4 smd: 1(0,0) 2(0,-21.8)
  silkscreen extent -11.45,-24.5 11.45,0.1, body extent -12,-23 12,0, height 9.7
MUA08A [mm]
  rect 1.02x0.41 smd: 1(0,0) 2(0,-0.65) 3(0,-1.3) 4(0,-1.95) 5(4.8,-1.95) 6(4.8,-1.3) 7(4.8,-0.65) 8(4.8,0)
  silkscreen extent 1,-2.28 3.8,0.33, body extent 0.9,-2.4 3.9,0.4, height 0.76
OSRAM_XX_M47K [mm] "LED UNDERMOUNT SM 0805"
  round 0 hole 2.7 unplated: 0(0,0)
  rect 2x1.3 smd: 1(2.5,0) 2(-2.5,0)
  silkscreen extent -1.55,-1.8 1.55,1.8, body extent -2.1,-0.6 2.1,0.6, height 1.01
PANASONIC_EVQQX [mm]
  rect 3.2x1 smd: 1(-3.4,2) 2(-3.4,-2) 3(3.4,-2) 4(3.4,2)
  silkscreen extent -5,-3.2 5,3.2, body extent -3.4,-3.1 3.4,3.1, height 3.1
PHOENIX_CONTACT_1933189 [mm] "Chip Resistor, Body 2.0x1.3mm, IPC Medium Density"
  rect 2.2x2.2 hole 1.7: 1(0,0)
  round 2.2 hole 1.7: 2(5,0)
  silkscreen extent -2.5,-3.7 7.5,10.6, body extent -2.5,-3.7 7.5,10.7, height 11.41
PUI_AUDIO_SMS-1308MS-R [mm] "SPEAKER 8 OHM SM"
  rect 2x2.2 smd: 1(-6.2,-4.35) 2(6.2,-4.35) 3(6.2,4.35) 4(-6.2,4.35)
  silkscreen extent -6.5,-6.5 6.5,6.5, body extent -6.5,-6.5 6.5,6.5, height 4.11
QFN40P500X500X80-41V_MODIFIED [mm] "QFN, 40-Leads, Body 5x5 mm, Pitch 0.4mm, NSC Recommended"
  rect 0.6x0.2 smd paste-0.125 mask+0.051: 1(-2.4,1.8) 2(-2.4,1.4) 3(-2.4,1) 4(-2.4,0.6) 5(-2.4,0.2) 6(-2.4,-0.2) 7(-2.4,-0.6) 8(-2.4,-1) 9(-2.4,-1.4) 10(-2.4,-1.8) 21(2.4,-1.8) 22(2.4,-1.4) 23(2.4,-1) 24(2.4,-0.6) 25(2.4,-0.2) 26(2.4,0.2) 27(2.4,0.6) 28(2.4,1) 29(2.4,1.4) 30(2.4,1.8)
  rect 0.2x0.6 smd paste-0.125 mask+0.051: 11(-1.8,-2.4) 12(-1.4,-2.4) 13(-1,-2.4) 14(-0.6,-2.4) 15(-0.2,-2.4) 16(0.2,-2.4) 17(0.6,-2.4) 18(1,-2.4) 19(1.4,-2.4) 20(1.8,-2.4) 31(1.8,2.4) 32(1.4,2.4) 33(1,2.4) 34(0.6,2.4) 35(0.2,2.4) 36(-0.2,2.4) 37(-0.6,2.4) 38(-1,2.4) 39(-1.4,2.4) 40(-1.8,2.4)
  rect 3.6x3.6 smd paste-1.8 mask+0.051: 41(0,0)
  silkscreen extent -3.52,-2.85 2.85,2.85, body extent -2.55,-2.55 2.55,2.55, height 0.8
QFN50P500X500-28VBM-MODIFIED [mm] "28-Pin Plastic Quad Flat No-Lead 0.5 mm Pitch"
  oval 0.85x0.25 smd: 1(-2.575,1.5) 2(-2.575,1) 3(-2.575,0.5) 4(-2.575,0) 5(-2.575,-0.5) 6(-2.575,-1) 7(-2.575,-1.5) 15(2.575,-1.5) 16(2.575,-1) 17(2.575,-0.5) 18(2.575,0) 19(2.575,0.5) 20(2.575,1) 21(2.575,1.5)
  oval 0.25x0.85 smd: 8(-1.5,-2.575) 9(-1,-2.575) 10(-0.5,-2.575) 11(0,-2.575) 12(0.5,-2.575) 13(1,-2.575) 14(1.5,-2.575) 22(1.5,2.575) 23(1,2.575) 24(0.5,2.575) 25(0,2.575) 26(-0.5,2.575) 27(-1,2.575) 28(-1.5,2.575)
  rect 3.4x3.4 smd: 29(0,0)
  silkscreen extent -3.67,-2.6 2.6,2.6, body extent -2.58,-2.58 2.58,2.58, height 1
"S8_N: Linear Tech SO8 NARROW" [mm] "8-Pin Small Outline Integrated Circuit 1.27 mm Pitch, IPC Medium Density"
  oval 2.2x0.6 smd: 1(-2.4,1.905) 2(-2.4,0.635) 3(-2.4,-0.635) 4(-2.4,-1.905) 5(2.4,-1.905) 6(2.4,-0.635) 7(2.4,0.635) 8(2.4,1.905)
  silkscreen extent -2.52,-2.5 0.9,2.88, body extent -1.95,-2.45 1.95,2.45, height 1.76
SHARP_PC817 [mm] "SHARP OPTOCOUPLER PC817"
  rect 1.2x1.4 smd: 1(0,0) 2(0,-2.54) 3(8.8,-2.54) 4(8.8,0)
  silkscreen extent 1,-3.6 7.8,1, body extent 1,-3.6 7.8,1, height 3.5
SOD123 [mm] "SOD-123; 2 Leads; Body 2.7 x 1.6 mm, (LxW)"
  rect 1.6x0.8 smd: 1(-1.7,0) 2(1.7,0)
  silkscreen extent -1.45,-0.85 1.45,0.85, body extent -1.4,-0.89 1.4,0.89, height 1.17
"SOT23 - TRANSISTOR" [mm] "SOT-23; 3 Leads; Body 3.1 x 2.5 mm, inc. leads (LxW max), Alternate Lead Configuration"
  rect 0.9x0.95 smd: 1(-0.95,-1.175) 2(0.95,-1.175) 3(0,1.175)
  silkscreen extent -2.03,-1.39 1.3,1.18, body extent -1.4,-0.89 1.4,0.89, height 1.02
SQFP50P1600X1600-100M_MODIFIED [mm] "Shrink QFP, 100-Leads, Body 14x14mm, Pitch 0.5mm, IPC Low Density"
  oval 2.1x0.3 smd: 1(-7.6,6) 2(-7.6,5.5) 3(-7.6,5) 4(-7.6,4.5) 5(-7.6,4) 6(-7.6,3.5) 7(-7.6,3) 8(-7.6,2.5) 9(-7.6,2) 10(-7.6,1.5) 11(-7.6,1) 12(-7.6,0.5) 13(-7.6,0) 14(-7.6,-0.5) 15(-7.6,-1) 16(-7.6,-1.5) 17(-7.6,-2) 18(-7.6,-2.5) 19(-7.6,-3) 20(-7.6,-3.5) 21(-7.6,-4) 22(-7.6,-4.5) 23(-7.6,-5) 24(-7.6,-5.5) 25(-7.6,-6) 51(7.6,-6) 52(7.6,-5.5) 53(7.6,-5) 54(7.6,-4.5) 55(7.6,-4) 56(7.6,-3.5) 57(7.6,-3) 58(7.6,-2.5) 59(7.6,-2) 60(7.6,-1.5) 61(7.6,-1) 62(7.6,-0.5) 63(7.6,0) 64(7.6,0.5) 65(7.6,1) 66(7.6,1.5) 67(7.6,2) 68(7.6,2.5) 69(7.6,3) 70(7.6,3.5) 71(7.6,4) 72(7.6,4.5) 73(7.6,5) 74(7.6,5.5) 75(7.6,6)
  oval 0.3x2.1 smd: 26(-6,-7.6) 27(-5.5,-7.6) 28(-5,-7.6) 29(-4.5,-7.6) 30(-4,-7.6) 31(-3.5,-7.6) 32(-3,-7.6) 33(-2.5,-7.6) 34(-2,-7.6) 35(-1.5,-7.6) 36(-1,-7.6) 37(-0.5,-7.6) 38(0,-7.6) 39(0.5,-7.6) 40(1,-7.6) 41(1.5,-7.6) 42(2,-7.6) 43(2.5,-7.6) 44(3,-7.6) 45(3.5,-7.6) 46(4,-7.6) 47(4.5,-7.6) 48(5,-7.6) 49(5.5,-7.6) 50(6,-7.6) 76(6,7.6) 77(5.5,7.6) 78(5,7.6) 79(4.5,7.6) 80(4,7.6) 81(3.5,7.6) 82(3,7.6) 83(2.5,7.6) 84(2,7.6) 85(1.5,7.6) 86(1,7.6) 87(0.5,7.6) 88(0,7.6) 89(-0.5,7.6) 90(-1,7.6) 91(-1.5,7.6) 92(-2,7.6) 93(-2.5,7.6) 94(-3,7.6) 95(-3.5,7.6) 96(-4,7.6) 97(-4.5,7.6) 98(-5,7.6) 99(-5.5,7.6) 100(-6,7.6)
  silkscreen extent -7.73,-6.15 6.15,6.82, body extent -7,-7 7,7, height 1.75
TSOT6 [mm] "TSOT 6 PIN"
  rect 0.69x1 smd: 1(0,0) 2(0.95,0) 3(1.9,0) 4(1.9,2.6) 5(0.95,2.6) 6(0,2.6)
  silkscreen extent -0.8,-1.52 2.6,2.6, body extent -0.8,0 2.6,2.6, height 1
TYCO_1981584-1 [mm] "CONN, MICRO USB TYPE AB"
  rect 0.4x1.35 smd: 1(0,0) 2(0.65,0) 3(1.3,0) 4(1.95,0) 5(2.6,0)
  rect 2.3x1.3 smd: 6(-2.5,-2.9) 7(5.1,-2.9)
  rect 1.6x1.4 smd: 8(4.5,-0.2) 9(-1.9,-0.2)
  silkscreen extent -2.5,-5.4 5.1,0.3, body extent -2.5,-5.5 5.1,0.3, height 3

## Part data
BAT1: "CONN, BAT HOLDER 2-COIN CELL 20MM, SMD, ROHS"
C1 C2 C6 C7: "CAP, CERAMIC, NPO, 18PF, 50V, 1206, 5%, RoHS"
C3 C8 C9 C11 C12 C13 C14 C15 C16 C17 C18 C19 C20 C21 C22 C23 C24 C29 C30 C31 C32 C33 C34 C35 C36 C38 C42 C44: "CAP, CERAMIC CHIP 0.1UF 10% 50V X7R ROHS"
C4 C5 C25 C26: "CAP, CERAMIC, NPO, 10PF, 50V, 1206, 5%, RoHS"
C10: "CAP, TANT, 220UF, 6.3V, 20%, LOW ESR, 3528, ROHS"
C27 C28: "CAP, CERAMIC CHIP 1UF 10% 50V X7R ROHS"
C37: "CAP, CERAMIC, X7R, 150NF, 50V, 1206, 10%, RoHS"
C39: "CAP, TANT, 22UF, 6.3V, 20%, LOW ESR, 1206ROHS"
C40 C41 C45 C46: "CAP, CERAMIC CHIP 0.01UF 10% 50V X7R ROHS"
C43: "CAP, TANT, 47UF, 25V, 20%, 3528 ROHS"
CS1 CS2 CS3 CS4 CS5 CS6 CS7 CS8 CS9 CS10 CS11 CS12 CS13 CS14 CS15 CS16 CS17 CS18 CS19 CS20 CS21 CS22 CS23 CS24 CS25 CS26 CS27 CS28 CS29 CS30 CS31 CS32 CS33 CS34 CS35 CS36 CS37 CS38 CS39 CS40 CS41 CS42 CS43 CS44 CS45 CS46 CS47 CS48: "CAP SENSOR FOR PCB"
D1 D16 D17 D18 D23: "Diode, Schottky rectifier, 40V, 1A, SMB package, Pb free"
D2 D3 D4 D5 D6: "DIODE,LED RED UNDER MOUNT SM VF=1.8 I=2MA ROHS"
D7: "DIODE, ZENER, 5.1V, 225MW, SOT-23, ROHS"
D8 D9 D11 D12: "VARISTOR, TVS, 5.5VDC, 1206, 150A, .60J, RoHS"
D10 D13 D14: "DIODE, 150MA, 100V, SOD123"
D15: "DIODE, ZENER, 18V, 225MW, SOT-23, ROHS"
D19 D21: "DIODE, 1A, 100V, SMA, ROHS"
D20 D22: "DIODE, ZENER, 33V, 225MW, SOT-23, ROHS"
FB1 FB2 FB3 FB4 FB5: "FERRITE, 1KOHM AT 100MHZ, 220MA, .450DCR"
J1: "CONN, HDR, 2X10, 100MIL, TH, ROHS"
J2 J3: "CONN, RCPTL MICRO USB TYPE AB, SM RA"
J4: "CONN, MICRO SD, SM, ROHS"
J5: "CONN, HDR, 2PIN, 5MM PHONIX CONTACT, ROHS"
L1: "INDUCTOR, 33UH, 10%, SMT, NON-SHIELDED, FERRITE CORE, ROHS"
Q1 Q3 Q10: "MOSFET P CHN, VDS=30V, RDSON = .6OHM, SOT 23"
Q2: "MOSFET P CHN, VDS=50V, RDSON = 10OHM, SOT 23"
Q4 Q5 Q14: "MOSFET P CHN, VDS=12V, RDSON = .05OHM, SOT 23"
Q6 Q7 Q8 Q9 Q11 Q12 Q13 Q15 Q16: "MOSFET N CHN, VDS=60V, 115 mA, SOT 23"
R1 R2 R3 R4 R5 R6 R12 R13 R24 R25 R26 R27 R29 R30 R35: "RESISTOR, CHIP 1206 10K OHM 1% 1/4W THICK FILM ROHS"
R7 R8 R9 R10 R11 R45: "RESISTOR, CHIP 1206 180 OHM 1% 1/4W THICK FILM ROHS"
R14: "RESISTOR, CHIP 1206 3K OHM 1% 1/4W THICK FILM ROHS"
R15 R20 R33 R37 R39 R43 R54 R56: "RESISTOR, CHIP 1206 100K OHM 1% 1/4W THICK FILM ROHS"
R16: "RESISTOR, CHIP 1206 1.5K OHM 1% 1/4W THICK FILM ROHS"
R17: "RESISTOR, CHIP 1206 4.7K OHM 1% 1/4W THICK FILM ROHS"
R18 R19: "RESISTOR, CHIP 1206 33 OHM 1% 1/4W THICK FILM ROHS"
R21 R22: "RESISTOR, CHIP 1206 1MOHM 1% 1/4W THICK FILM ROHS"
R23: "RESISTOR, POT 10K OHM 20% THUMBWHELL, CERM, TH, ROHS"
R28: "RESISTOR, CHIP 1206 10 OHM 1% 1/4W THICK FILM ROHS"
R31: "RESISTOR, CHIP 1206 100 OHM 1% 1/4W THICK FILM ROHS"
R32 R57: "RESISTOR, CHIP 1206 330 OHM 1% 1/4W THICK FILM ROHS"
R34 R36 R44: "RESISTOR, CHIP 1206 300K OHM 1% 1/4W THICK FILM ROHS"
R38: "RESISTOR, CHIP 1206 220 OHM 1% 1/4W THICK FILM ROHS"
R40: "RESISTOR, CHIP 1206 3.32K OHM 1% 1/4W THICK FILM ROHS"
R41: "RESISTOR, CHIP 1206 11K OHM 1% 1/4W THICK FILM ROHS"
R42: "RESISTOR, CHIP 1206 59K OHM 1% 1/4W THICK FILM ROHS"
R46 R55: "RESISTOR, CHIP 1206 1K OHM 1% 1/4W THICK FILM ROHS"
R47: "RESISTOR, CHIP 1206 30K OHM 1% 1/4W THICK FILM ROHS"
R48: "RESISTOR, CHIP 1206 12K OHM 1% 1/4W THICK FILM ROHS"
R49: "RESISTOR, CHIP 1206 7.5K OHM 1% 1/4W THICK FILM ROHS"
R50 R51: "RESISTOR, CHIP 1206 0.0 OHM 1% 1/4W THICK FILM ROHS"
R52: "RESISTOR, CHIP 1206 357 OHM 1% 1/4W THICK FILM ROHS"
R53: "RESISTOR, CHIP 1206 270 OHM 1% 1/4W THICK FILM ROHS"
SPK1: "SPEAKER 8OHM .7W 88DB 13MM SMD"
SW1 SW2: "SWITCH, MOM, NO, SM"
U1: "LCD, 4X20 WITH ICONS, SERIAL INTERFACE, 5X8DOT, WHITE BACKLIGHT"
U2: "IC, TXRX USB TO UART BRIDGE, ROHS, 28QFN"
U3: "IC, SHUNT VOLTAGE REFERENCE"
U4: "IC, MICRO CONTROLLER, 512KB FLASH, 64K, ARM CORTEX M3, 100LQFP"
U5: "IC AUDIO AMP, CLASS AB, 325mW, 8SOIC, ROHS"
U6: "IC, EEPROM, I2C, 256x8, 8PIN SO8, ROHOS"
U7 U8: "IC, TOUCHKEY CONTROLLER, 24CH, I2C, 40QFN"
U9: "IC, BUCK REGULATOR, 0.6A, TSOT23-6"
U10: "IC, PHOTOCOUPLER, NPN OUTPUT - NO BASE, SM, ROHS"
X1: "CRYSTAL, 32.768KHZ, 12.5PF, SMT SM CYLINDRICAL CAN"
X2: "CRYSTAL, 12.000MHZ, 18PF, SMT HC49/US"

## Via types
v1: diameter 30, hole 15, Top Layer to Bottom Layer, 230 vias
v2: diameter 30, hole 15, Top Layer to Bottom Layer, tented top, 11 vias

## Nets (pads, with @x,y where several pads share a name; then routed paths per layer and width w, separated by ;. In a path a pad name is that pad's centre, name@x,y a point inside that pad or via, vN(x,y) a via of type N, cw(c..) or ccw(c..) an arc to the next point about the centre after c; other vN are vias at no path point)
3.3V: C14.1 C15.1 C16.1 C17.1 C18.1 C19.1 C20.1 C21.1 C22.1 C23.1 C24.1 C29.1 C30.1 C31.1 C32.1 C33.1 C34.1 C35.1 C36.1 C38.1 C39.1 D10.2 D19.2 FB2.1 J1.1 J1.2 J4.4 L1.2 Q1.2 R1.2 R2.2 R3.2 R5.2 R7.2 R8.2 R9.2 R10.2 R11.2 R15.2 R20.2 R24.2 R25.2 R26.2 R27.2 R29.2 R30.2 R33.2 R40.2 R56.2 R57.1 U1.2 U2.6 U4.19 U4.28 U4.42 U4.54 U4.71 U4.84 U4.96 U6.8 U7.5 U7.14 U7.30 U7.35 U8.5 U8.14 U8.19 U8.30 U8.35 | length 8997.6
  Top Layer w7: L1.2@4290.55,4119.88 4320.67,4150 4308.17,4137.5 L1.2@4290.55,4119.88
  Top Layer w8: J4.4@270.08,4292.13 270.08,4204.92 v1(350,4125) ; v1(3000,4460) D19.2@3000,4525
  Top Layer w10: v1(4075,4120) 4075.12,4119.88 4209.88,4119.88 4240,4150 L1.2@4295.67,4150
  Bottom Layer w7: C29.1@1305.12,1025 1350,1025 v1(1365,1040) 1367.13,1042.13 U7.5@1430.51,1042.13 ; v1(1400,1550) C32.1@1400,1380.12 1419.88,1380.12 1450,1350 1450,1226.55 1501.38,1175.17 U7.14@1501.38,1144.49 ; U7.35@1532.87,955.51 1533.19,955.2 1533.19,922.54 1550,905.73 v1(1550,855.12) ; U7.30@1619.49,979.13 1698.62,900 C31.1@1744.88,900 1794.88,850 v1(2050,850) ; v1(3650,1050) 3668.46,1031.54 3668.46,1000.51 3713.62,955.35 3878.8,955.35 3903.11,979.66 3903.11,1022.09 3907.41,1026.38 U8.14@3955.51,1026.38 ; v1(3950,1540) 3950,1476.95 3868.07,1395.02 3868.07,1176.3 3938.94,1105.43 3955.2,1105.43 U8.19@3955.51,1105.12 ; v1(4050,830.12) 4050,875 4057.87,882.87 U8.5@4057.87,955.51 ; U8.30@4120.87,1144.49 4120.87,1240.75 C35.1@4125,1244.88 4125,1271.93 4171.93,1318.86 4171.93,1546.93 v1(4175,1550) ; U8.35@4144.49,1057.87 4237.82,1057.87 4245.69,1050 v1(4269.88,1050) ; C38.1@4669.88,3900 C38.1@4675,3905.12 4744.88,3905.12 v1(4745,3905)
  Bottom Layer w8: C22.1@280.12,4125 v1(350,4125) ; R15.2@725,4230.12 R15.2@725.12,4230 ; R25.2@805.12,2350 R25.2@825,2369.88 ; v1(820,4230) 819.88,4230.12 R15.2@750,4230.12 851.38,4128.74 Q1.2@862.6,4128.74 ; v1(880,2725) R29.2@944.88,2725 R30.2@944.88,2825 ; v1(1055,3050) 1055,3040 1055.12,3039.88 C18.1@1055.12,2975 1057.28,2972.83 U4.54@1200.79,2972.83 ; v1(1055,3370) 1055.12,3369.88 C19.1@1055.12,3300 1062.6,3307.48 U4.71@1200.79,3307.48 ; U4.42@1421.26,2850.79 1421.26,2708.86 C17.1@1425,2705.12 1494.88,2705.12 v1(1495,2705) ; U4.84@1421.26,3449.21 1423.04,3450.99 1423.04,3592.92 C20.1@1425,3594.88 1489.88,3594.88 1490,3595 v1(1500,3595) ; U2.6@1539.37,4251.38 1539.37,4299.37 1560,4320 1624.88,4320 C24.1@1625,4319.88 1689.88,4319.88 1690,4320 v1(1695,4320) ; U4.28@1696.85,2850.79 1696.85,2788.15 1720,2765 1790,2765 1805.12,2749.88 C16.1@1805.12,2700 v1(1870,2700) ; U4.19@1799.21,3031.89 1903.11,3031.89 v1(1920,3015) 1935,3000 C15.1@1994.88,3000 ; D10.2@1888.19,2294.88 D10.2@1903.07,2280 ; v1(2045,3370) 2045,3240.43 FB2.1@2060.43,3225 ; v1@2119.88,2279.88 v1(2120,2280) ; R56.2@2600,3944.88 2699.88,3944.88 v1(2700,3945) ; C36.1@3585.12,1050 v1(3650,1050)
  Bottom Layer w10: R57.1@200,2644.88 319.88,2644.88 U1.2@325,2650 ; v1(725,2250) C23.1@655.12,2250 655.12,2310.63 U6.8@694.49,2350 R25.2@805.12,2350 ; R25.2@825,2369.88 R24.2@925,2369.88 ; U4.96@1657.48,3449.21 1657.48,3652.36 C21.1@1700,3694.88 1829.88,3694.88 v1(1830,3695) ; R20.2@1800,2294.88 D10.2@1888.19,2294.88 ; D10.2@1903.07,2280 v1(2120,2280) ; R26.2@2119.88,2075 R27.2@2119.88,2175 v1@2119.88,2279.88 ; C14.1@2194.88,3310 2250,3254.88 v1(2250,3240) ; R33.2@2825,4655.12 2979.88,4655.12 3000,4635 v1(3000,4460) ; v1(3630,3140) 3630,3100.12 R9.2@3680.12,3050 ; R11.2@3680.12,2700 R10.2@3680.12,2875 R9.2@3680.12,3050 ; R7.2@3680.12,3400 R8.2@3680.12,3225 R9.2@3680.12,3050 ; v1(4075,2730) R5.2@4075,2794.88 ; R3.2@4375,2794.88 R2.2@4475,2794.88 ; v1(4475,2730) R2.2@4475,2794.88 ; R1.2@4575,2794.88 R2.2@4475,2794.88 ; R40.2@4580.12,3900 C38.1@4669.88,3900
3.3VA: FB2.2 R14.1 U4.10 | length 288.3
  Bottom Layer w10: U4.10@1799.21,3209.06 1861.35,3209.06 1878.4,3192 1956.57,3192 FB2.2@1989.57,3225 1994.88,3230.32 R14.1@1994.88,3300
6V: BAT1.1 Q4.2 R32.2 R37.2 R43.2 R44.2 | length 4300
  Top Layer w10: v1(5075,4455) BAT1.1@5075,4600
  Bottom Layer w10: Q4.2@3915,3906.14 Q4.2@3912.6,3903.74 3875,3866.14 R44.2@3875,3830.12 ; R43.2@3975,3830.12 R44.2@3875,3830.12 ; R37.2@4675,4455.12 5074.88,4455.12 v1(5075,4455) 5465,4455 5500,4420 R32.2@5500,3980.12 5500,3955.2 5567,3888.2 5567,3515.11 5479.89,3428 5003.4,3428 4997.4,3422 3943,3422 3800,3565 3800,3805 3825.12,3830.12 R44.2@3875,3830.12
\BOOT: SW2.2 SW2.3 U4.53 | length 799.6
  Bottom Layer w8: SW2.2@733.86,2796.26 865.16,2927.57 1091.58,2927.57 1117.17,2953.15 U4.53@1200.79,2953.15
  Bottom Layer w10: SW2.3@466.14,2796.26 SW2.2@733.86,2796.26
\CS_LCD: U1.5 U4.79 | length 1592.1
  Top Layer w7: U1.5@325,2950 450,3075 v1(450,3545)
  Bottom Layer w7: v1(450,3545) 454.5,3540.5 1287.63,3540.5 1320.56,3507.58 1320.56,3451.49 U4.79@1322.83,3449.21
\CS_SDMEM: J4.2 U4.63 | length 2187.8
  Top Layer w7: v1(355,4240) 355,4314.06 J4.2@356.69,4315.75
  Bottom Layer w7: v1(355,4240) 355,4225 330,4200 250,4200 227.88,4177.88 227.88,4078.59 220,4070.71 220,3256.21 267.71,3208.5 361.5,3208.5 420,3150 U4.63@1200.79,3150
\INT_ACAP: R29.1 U4.51 U7.18 | length 5264.5
  Bottom Layer w7: R29.1@1055.12,2725 1175,2725 ; U7.18@1564.37,1144.49 1564.37,1183.34 1614.65,1233.62 1614.65,1694.65 1645,1725 2300,1725 2326.5,1751.5 2326.5,2288.5 2275,2340 2165.12,2340
  Bottom Layer w8: U4.51@1200.79,2913.78 1200.79,2750.79 1175,2725 1100,2650 685,2650 583,2548 583,2388.82 595,2376.82 595,2115 642,2068 1683,2068 1750,2135 1750,2328.78 1761.22,2340 2165.12,2340
\INT_BCAP: R30.1 U4.52 U8.18 | length 4975.1
  Top Layer w7: 2625,2040 3025,2040 v1(3050,2015)
  Top Layer w8: v1(1100,2875) 1100,2150 1175,2075 2245,2075 2300.5,2019.5 2508.58,2019.5 2523,2005.08 2523,1988.82 2538.82,1973 2568,1973 2580,1985 2580,2020 2600,2040 2625,2040
  Bottom Layer w7: v1(3050,2015) 3075,2040 3225,2040 3896.36,2040 3970,1966.36 3970,1597.48 3923.5,1550.98 3923.5,1471.66 3853.07,1401.23 3853.07,1166.93 3930.63,1089.37 U8.18@3955.51,1089.37
  Bottom Layer w8: R30.1@1055.12,2825 1055.12,2830.12 v1(1100,2875) 1100,2910 1125,2935 1199.25,2935 U4.52@1200.79,2933.46
\LCD_RST: U1.4 U4.56 | length 1064
  Bottom Layer w8: U1.4@325,2850 385,2910 385,3025 437,3077 1066.18,3077 1130.98,3012.2 U4.56@1200.79,3012.2
\LED_DRIVE: D3.2 U4.33 | length 2678.8
  Bottom Layer w8: U4.33@1598.43,2850.79 1598.43,2647.06 1691.48,2554 2713.88,2554 2823.63,2444.25 3081.88,2444.25 3116,2478.37 3116,3186 3155,3225 D3.2@3251.57,3225
\LED_HEX: D5.2 U4.35 | length 2401.2
  Bottom Layer w8: U4.35@1559.06,2850.79 1559.06,2641.17 1678.23,2522 2700.63,2522 2810.37,2412.25 3095.14,2412.25 3148,2465.12 3148,2828 3195,2875 D5.2@3251.57,2875
\LED_METER: D4.2 U4.34 | length 2525.4
  Bottom Layer w8: U4.34@1578.74,2850.79 1578.74,2644.12 1684.86,2538 2707.25,2538 2817,2428.25 3088.51,2428.25 3132,2471.75 3132,2982 3200,3050 D4.2@3251.57,3050
\LED_RAD: D6.2 U4.36 | length 2282.9
  Bottom Layer w8: U4.36@1539.37,2850.79 1539.37,2638.23 1671.6,2506 2694,2506 2803.75,2396.25 3101.76,2396.25 3164,2458.49 3164,2684 3180,2700 D6.2@3251.57,2700
\MC_RST: C3.1 D10.1 R20.1 SW1.2 SW1.3 U4.17 | length 1468.4
  Top Layer w8: v1(1575,2530) v1(1575,3070)
  Bottom Layer w8: v1(1575,2530) 1578.74,2526.26 SW1.2@1578.74,2433.86 ; v1(1575,3070) 1576.26,3071.26 U4.17@1799.21,3071.26 ; SW1.3@1578.74,2166.14 SW1.2@1578.74,2433.86 ; D10.1@1900,2416.93 1898.07,2415 1865,2415 1855,2405 1854.88,2405.12 R20.1@1800,2405.12 C3.1@1700,2405.12 1699.88,2405 1630,2405 1601.14,2433.86 SW1.2@1578.74,2433.86
\SYS_RST: U2.9 U4.14 U7.22 U8.22 | length 7824.5
  Top Layer w8: v1(1710,3130) 1704,3136 1704,3511.63 1770,3577.63 v1(1770,4190) ; v1(2425,2250) v1(2425,3650)
  Bottom Layer w7: U2.9@1601.38,4189.37 U2.9@1602.01,4190 ; U7.22@1619.49,1105.12 1619.8,1105.43 1636.06,1105.43 1675,1144.37 1675,1625 1700,1650 2300,1650 2425,1775 v1(2425,2250) ; v1(1710,3130) v1@1710.32,3130.32 ; 2425,2110 2450,2085 3915,2085 4015,1985 4015,1478.31 3913.07,1376.38 3913.07,1202.41 3928.59,1186.89 3968.75,1186.89 3994.57,1161.06 3994.57,1144.8 U8.22@3994.88,1144.49
  Bottom Layer w8: U2.9@1602.01,4190 v1(1770,4190) ; v1@1710.32,3130.32 U4.14@1799.21,3130.32 ; v1(1770,3650) v1(2425,3650)
\TRST: J1.3 R1.1 U4.4 | length 3331.4
  Top Layer w8: v1(4320,3260) 4555,3260 4575,3240 J1.3@4575,3125
  Bottom Layer w8: U4.4@1799.21,3327.17 1865.05,3327.17 2042.88,3505 2743.23,3505 2746.23,3508 2904.63,3508 2907.63,3505 3690,3505 3910,3285 4295,3285 v1(4320,3260) ; R1.1@4575,2905.12 4575,2965.6 4533,3007.6 4533,3042.4 4575,3084.4 J1.3@4575,3125
\USB_UP: D2.2 U4.32 | length 2805.9
  Bottom Layer w8: U4.32@1618.11,2850.79 1618.11,2650 1698.11,2570 2720.51,2570 2830.25,2460.25 3075.25,2460.25 3100,2485 3100,3345 3155,3400 D2.2@3251.57,3400
ACAP0: CS37.1 U7.1 | length 1766.9
  Bottom Layer w7: v1(300,300) 300,525 325,550 1382.57,550 1428.07,595.49 1428.07,976.69 U7.1@1430.51,979.13
ACAP1: CS27.1 U7.2 | length 269.8
  Bottom Layer w7: v1(1300,800) 1300,900 1348.07,948.07 1360.54,948.07 1407.36,994.88 U7.2@1430.51,994.88
ACAP2: CS26.1 U7.3 | length 818.1
  Bottom Layer w7: v1(800,800) 800,950 828.07,978.07 1220.6,978.07 1235.6,963.07 1347.59,963.07 1395.15,1010.63 U7.3@1430.51,1010.63
ACAP3: CS14.1 U7.8 | length 820.3
  Bottom Layer w7: v1(800,1300) 800,1125 815,1110 1386.21,1110 1406.84,1089.37 U7.8@1430.51,1089.37
ACAP4: CS15.1 U7.9 | length 324.1
  Bottom Layer w7: v1(1275,1300) 1275,1150 1300,1125 1392.43,1125 1412.31,1105.12 U7.9@1430.51,1105.12
ACAP5: CS1.1 U7.10 | length 1916.2
  Top Layer w8: v1(300,1800) 310,1810 CS1.1@310,1830 ; CS1.1@400,1805 CS1.1@335,1805 ; CS1.1@310,1830 CS1.1@335,1805 ; CS1.1@310,1830 320,1820 CS1.1@335,1805
  Bottom Layer w7: v1(300,1800) 300,1550 325,1525 1300,1525 1323.07,1501.93 1323.07,1221.2 1347.38,1196.89 1394.81,1196.89 1430.51,1161.18 U7.10@1430.51,1120.87
ACAP6: CS2.1 U7.11 | length 1232.5
  Bottom Layer w7: v1(800,1800) 800,1575 825,1550 1300,1550 1338.07,1511.93 1338.07,1227.41 1353.59,1211.89 1401.02,1211.89 1454.13,1158.77 U7.11@1454.13,1144.49
ACAP7: CS3.1 U7.12 | length 753.7
  Bottom Layer w7: v1(1300,1800) 1300,1591 1353.07,1537.93 1353.07,1233.62 1359.8,1226.89 1407.23,1226.89 1469.88,1164.24 U7.12@1469.88,1144.49
ACAP8: CS17.1 U7.28 | length 1007.2
  Bottom Layer w7: U7.28@1619.49,1010.63 1658.63,1010.63 1696.2,973.07 2273.07,973.07 2300,1000 v1(2300,1300)
ACAP9: CS18.1 U7.29 | length 1513.1
  Bottom Layer w7: U7.29@1619.49,994.88 1639.32,994.88 1676.14,958.07 2758.07,958.07 2800,1000 v1(2800,1300)
ACAP10: CS30.1 U7.31 | length 1305.5
  Bottom Layer w7: U7.31@1595.87,955.51 1596.44,955.51 1641.93,910.02 1641.93,909.44 1701.38,850 1716.38,835 2027.52,835 2039.02,823.5 2060.98,823.5 2087.48,850 2775,850 2800,825 v1(2800,800)
ACAP11: CS29.1 U7.32 | length 822.4
  Bottom Layer w7: U7.32@1580.12,955.51 1580.43,955.2 1580.43,938.94 1591.25,928.11 1602.62,928.11 1626.93,903.8 1626.93,892.43 1699.37,820 2021.31,820 2032.81,808.5 2067.19,808.5 2093.69,835 2265,835 v1(2300,800)
ACAP12: CS28.1 U7.33 | length 323.6
  Bottom Layer w7: U7.33@1564.37,955.51 1564.68,955.2 1564.68,933.47 1585.04,913.11 1596.41,913.11 1611.93,897.59 1611.93,886.22 1698.15,800 1708.15,790 v1(1800,790)
ACAP13: CS42.1 U7.34 | length 1824.9
  Bottom Layer w7: U7.34@1548.62,955.51 1548.93,955.2 1548.93,928.01 1578.83,898.11 1590.2,898.11 1596.93,891.38 1596.93,653.07 1675,575 2775,575 2800,550 v1(2800,300)
ACAP14: CS39.1 U7.39 | length 725.9
  Bottom Layer w7: v1(1300,300) 1300,425 1458.07,583.07 1458.07,910.02 1469.88,921.83 U7.39@1469.88,955.51
ACAP15: CS38.1 U7.40 | length 1250.9
  Bottom Layer w7: v1(800,300) 800,500 825,525 1378.79,525 1443.07,589.28 1443.07,916.23 1454.13,927.3 U7.40@1454.13,955.51
ACAP16: CS25.1 U7.6 | length 1398
  Bottom Layer w7: v1(300,800) 300,1050 325,1075 1375,1075 1392.13,1057.87 U7.6@1430.51,1057.87
ACAP17: CS13.1 U7.7 | length 1326.8
  Bottom Layer w7: v1(300,1300) 300,1125 330,1095 1380,1095 1401.38,1073.62 U7.7@1430.51,1073.62
ACAP18: CS4.1 U7.15 | length 957.9
  Bottom Layer w7: U7.15@1517.13,1144.49 1517.13,1180.63 1470.35,1227.41 1470.35,1423.58 1484.88,1438.11 1484.88,1734.88 1550,1800 v1(1800,1800)
ACAP19: CS5.1 U7.16 | length 1437.3
  Bottom Layer w7: U7.16@1532.87,1144.49 1532.87,1186.1 1485.35,1233.62 1485.35,1417.37 1503.07,1435.09 1503.07,1728.07 1525,1750 2250,1750 v1(2300,1800)
ACAP20: CS6.1 U7.25 | length 2243.2
  Bottom Layer w7: U7.25@1619.49,1057.87 1653.82,1057.87 1708.62,1003.07 1891.38,1003.07 1898.11,1009.8 1898.11,1090.2 1876.38,1111.93 1733.07,1111.93 1700,1145 1700,1600 1725,1625 2300,1625 2475,1800 v1(2800,1800)
ACAP21: CS16.1 U7.26 | length 665.7
  Bottom Layer w7: U7.26@1619.49,1042.13 1648.35,1042.13 1702.41,988.07 1787.35,988.07 1897.59,988.07 1913.11,1003.59 1913.11,1186.89 v1(1800,1300)
ACAP22: CS41.1 U7.37 | length 1363.5
  Bottom Layer w7: U7.37@1501.38,955.51 1501.38,910.9 1488.07,897.59 1488.07,711.93 1650,550 2275,550 2300,525 v1(2300,300)
ACAP23: CS40.1 U7.38 | length 869.4
  Bottom Layer w7: U7.38@1485.63,955.51 1485.63,916.37 1473.07,903.8 1473.07,701.93 1650,525 1775,525 1800,500 v1(1800,300)
ADC_BAT: C40.1 R37.1 R39.2 U4.9 | length 4708.9
  Top Layer w10: v1(1890,3220) 1890,3227.14 1881.28,3227.14 1860,3248.43 1860,3890 1798,3952 1798,4212 1775,4235 1775,4675 1800,4700 1800.39,4699.61 4155.39,4699.61 v1(4400,4455)
  Bottom Layer w10: U4.9@1799.21,3228.74 1885,3228.74 1890,3223.74 v1(1890,3220) ; v1(4400,4455) 4474.88,4455 C40.1@4475,4455.12 R39.2@4575,4455.12 4575,4415 4590,4400 4660,4400 4675,4385 R37.1@4675,4344.88
ADC_METER: C44.1 D19.1 D21.2 R31.2 R42.2 R47.2 R48.2 R49.2 U4.8 | length 3105
  Top Layer w10: v1(1810,4655) 1924.88,4655 R49.2@1925,4655.12 ; v1(1865,4050) 1890,4025 v1(1890,3266.74) ; R49.2@1920.12,4655.12 R49.2@1925,4655.12 ; D19.1@3000,4650.98 2999.02,4650 D21.2@2850,4650 2844.88,4655.12 C44.1@2725,4655.12 R31.2@2625,4655.12 R47.2@2125,4655.12 R48.2@2025,4655.12 R49.2@1925,4655.12
  Bottom Layer w10: U4.8@1799.21,3248.43 1885,3248.43 1890,3253.43 v1(1890,3266.74) ; v1(1865,4050) 1861.54,4050 1806.88,4104.65 1806.88,4651.88 v1(1810,4655) 1835.12,4680.12 2055.12,4680.12 R42.2@2175,4680.12
ADC_VUSB: D7.3 R12.1 R13.2 U4.7 | length 1904
  Top Layer w10: v1(1295,3265) v1(1295,3915)
  Bottom Layer w10: R13.2@1200,4544.88 R12.1@1300,4544.88 1300,4515 1275,4490 D7.3@1275,4378.74 1275,3935 v1(1295,3915) ; v1(1295,3265) 1298.11,3268.11 U4.7@1799.21,3268.11
AOUT: D14.1 U4.6 | length 2152
  Top Layer w8: v1(3000,3405) 3225,3405 3275,3455 v1(3275,3925)
  Bottom Layer w8: U4.6@1799.21,3287.8 1872.87,3287.8 2055.08,3470 2721,3470 2783,3408 2997,3408 v1(3000,3405) ; v1(3275,3925) D14.1@3275,4008.07
BCAP0: CS34.1 U8.1 | length 1252.9
  Bottom Layer w7: U8.1@4120.87,955.51 4141.93,934.44 4141.93,583.07 4150,575 4775,575 4800,600 v1(4800,800)